# Altium PCB BauhallenUhr_Variante_3.PcbDoc (part 1 of 2)
Units mm, origin at the board's own origin, x right, y up, seen from the top; angles counter-clockwise.
Board outline 93.98 x 68.58 mm, 4 copper layers (Top Layer, Signal Layer 2, GND Layer 3, Bottom Layer), stack 1.54 mm thick; 120 components, 80 nets, 567 pads, 100 vias.
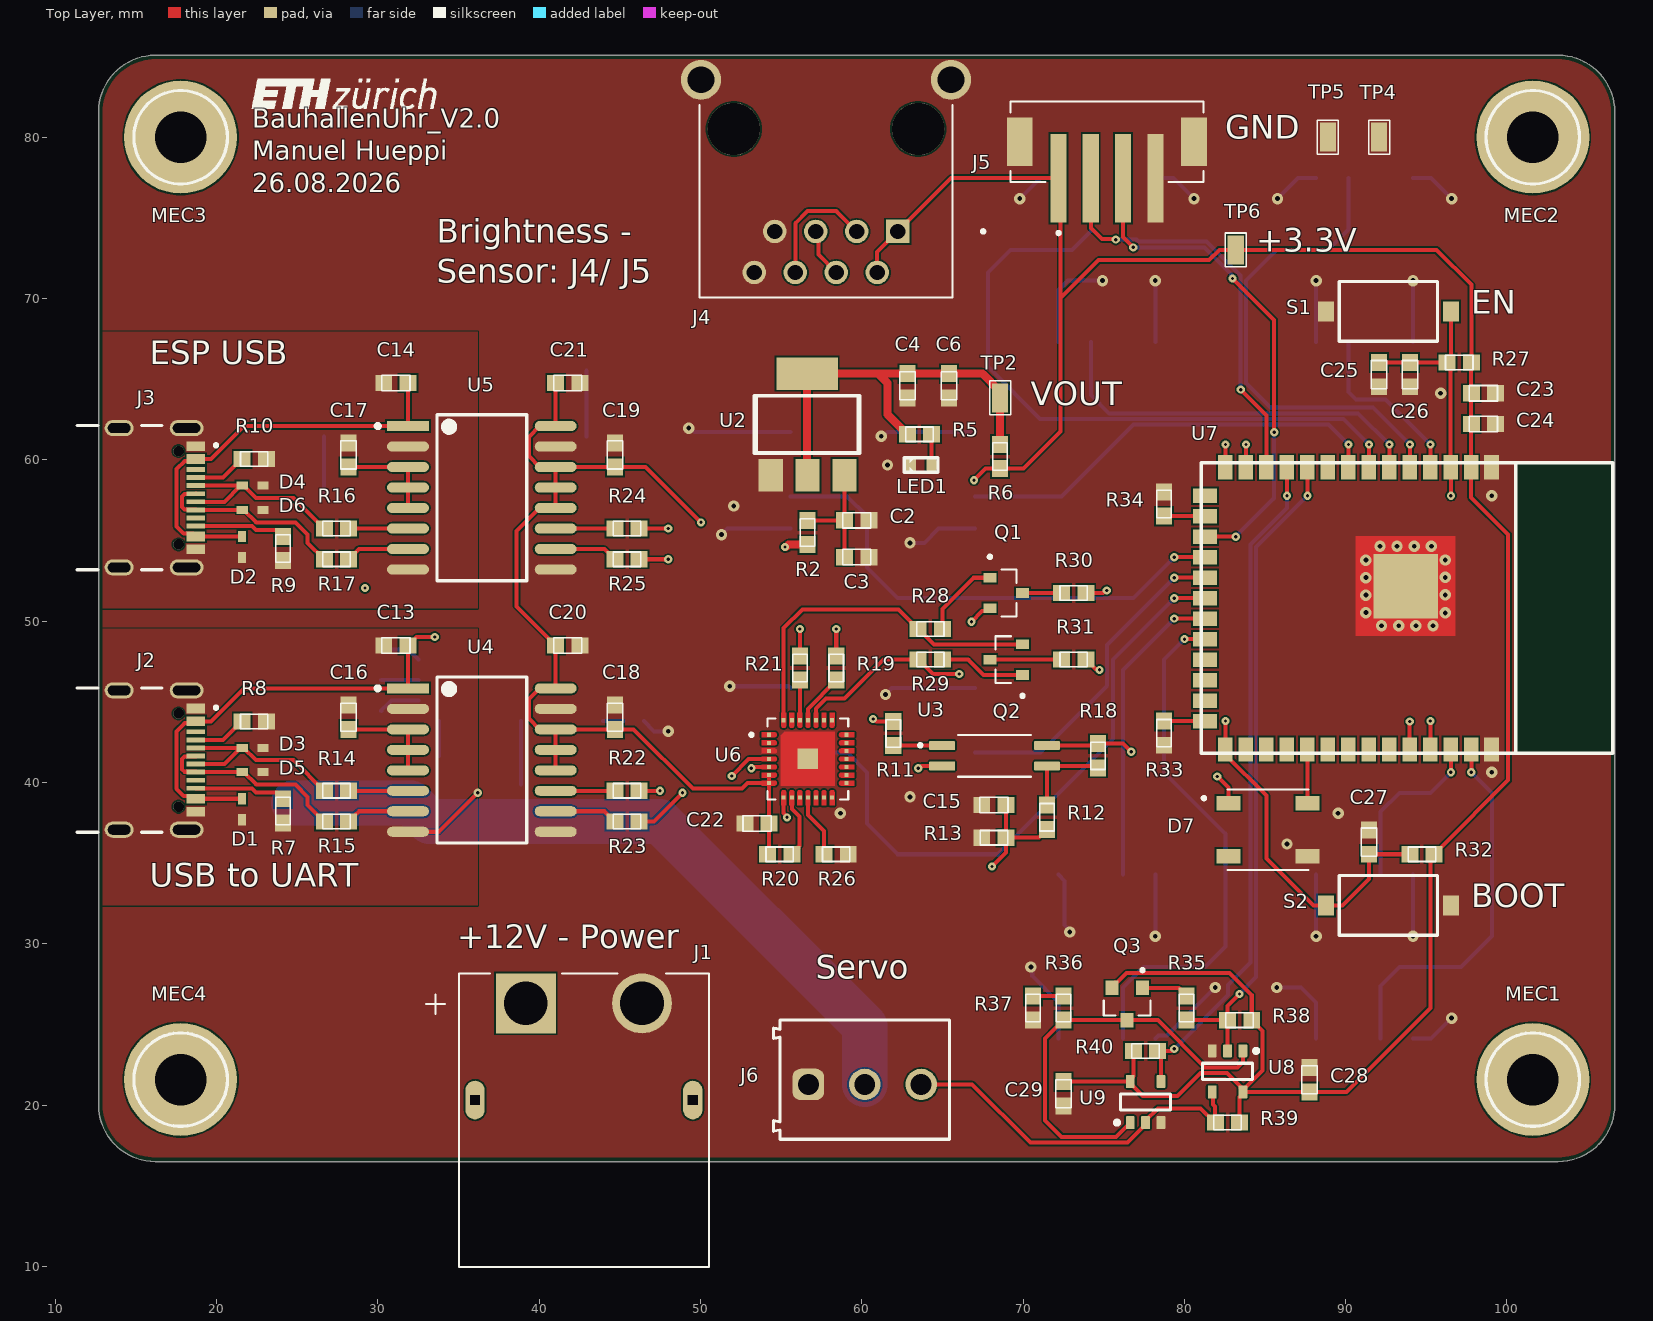
[diagram p0: Top Layer view]
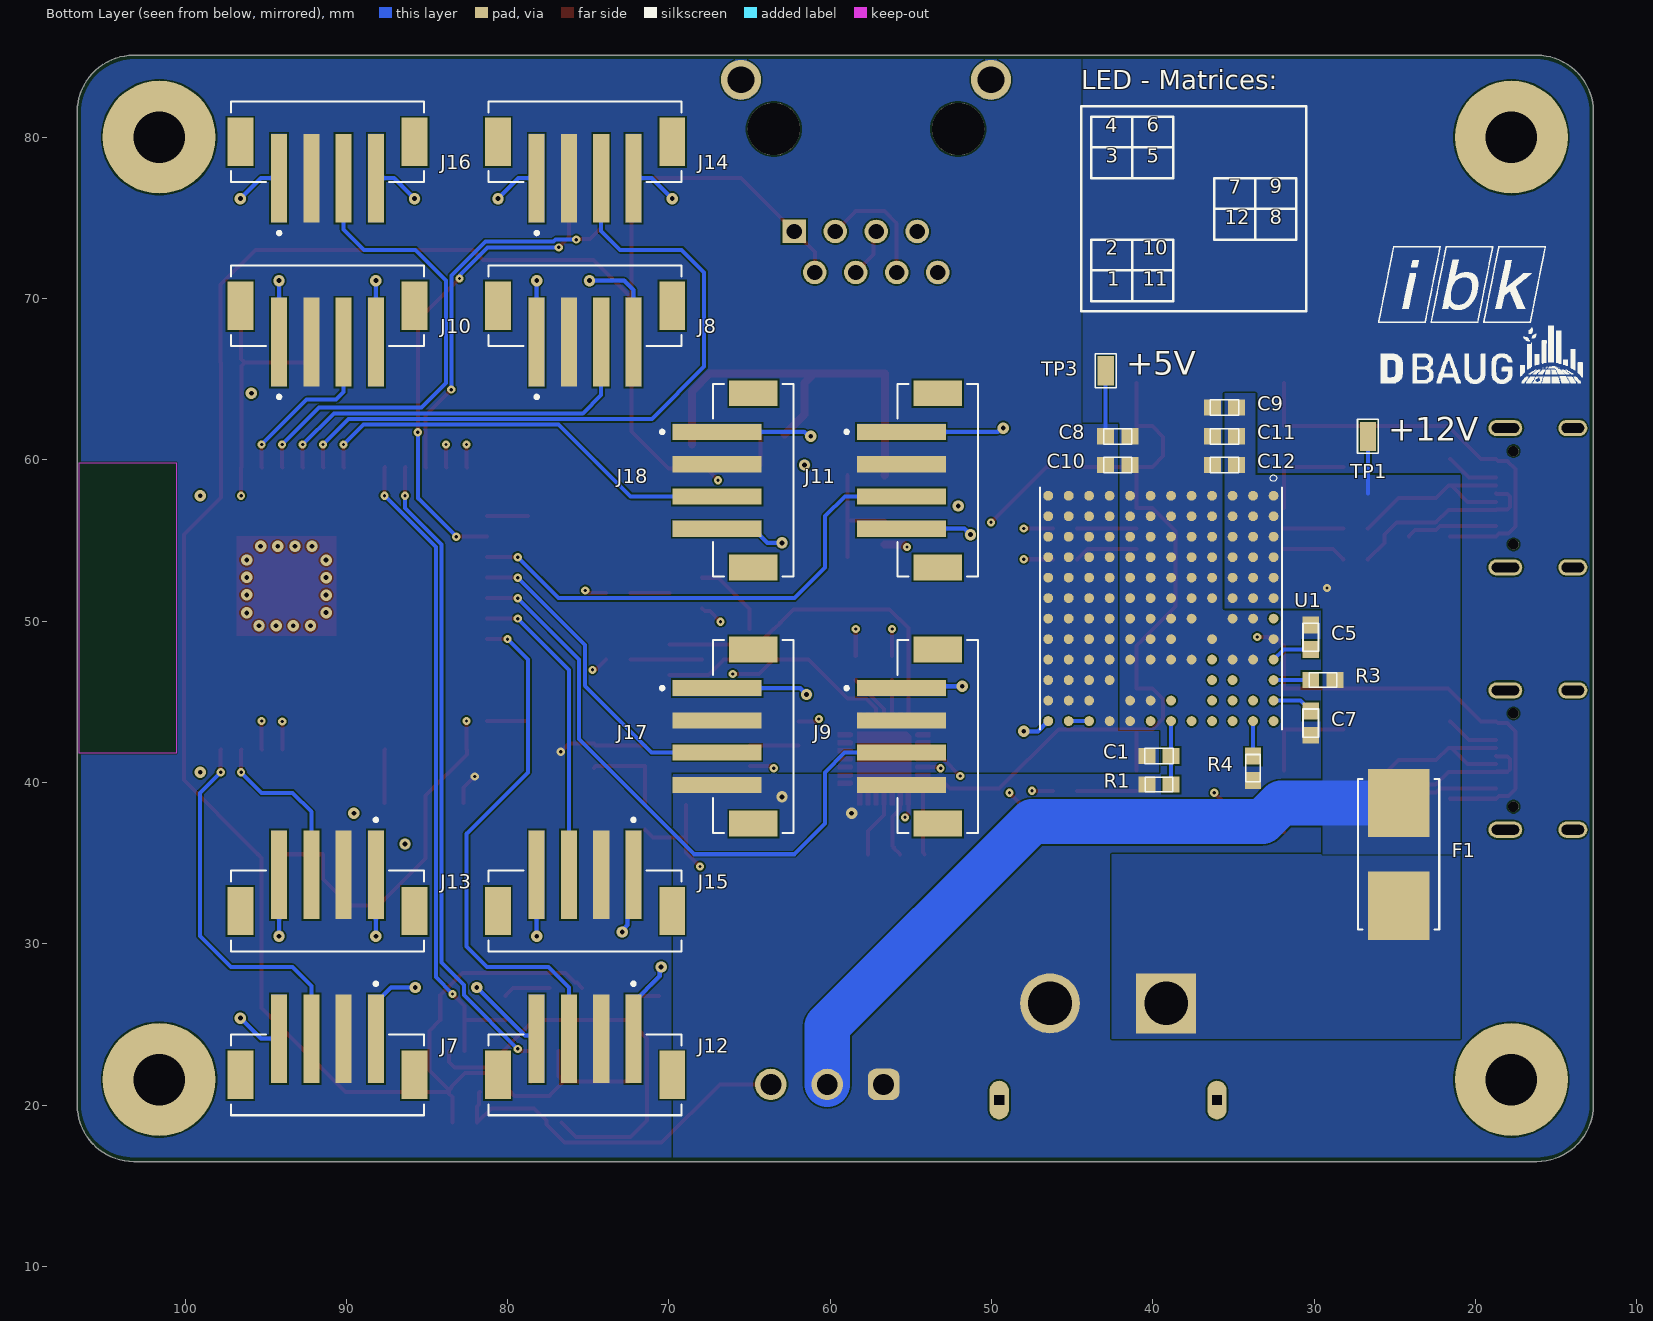
[diagram p1: Bottom Layer view, seen from below]
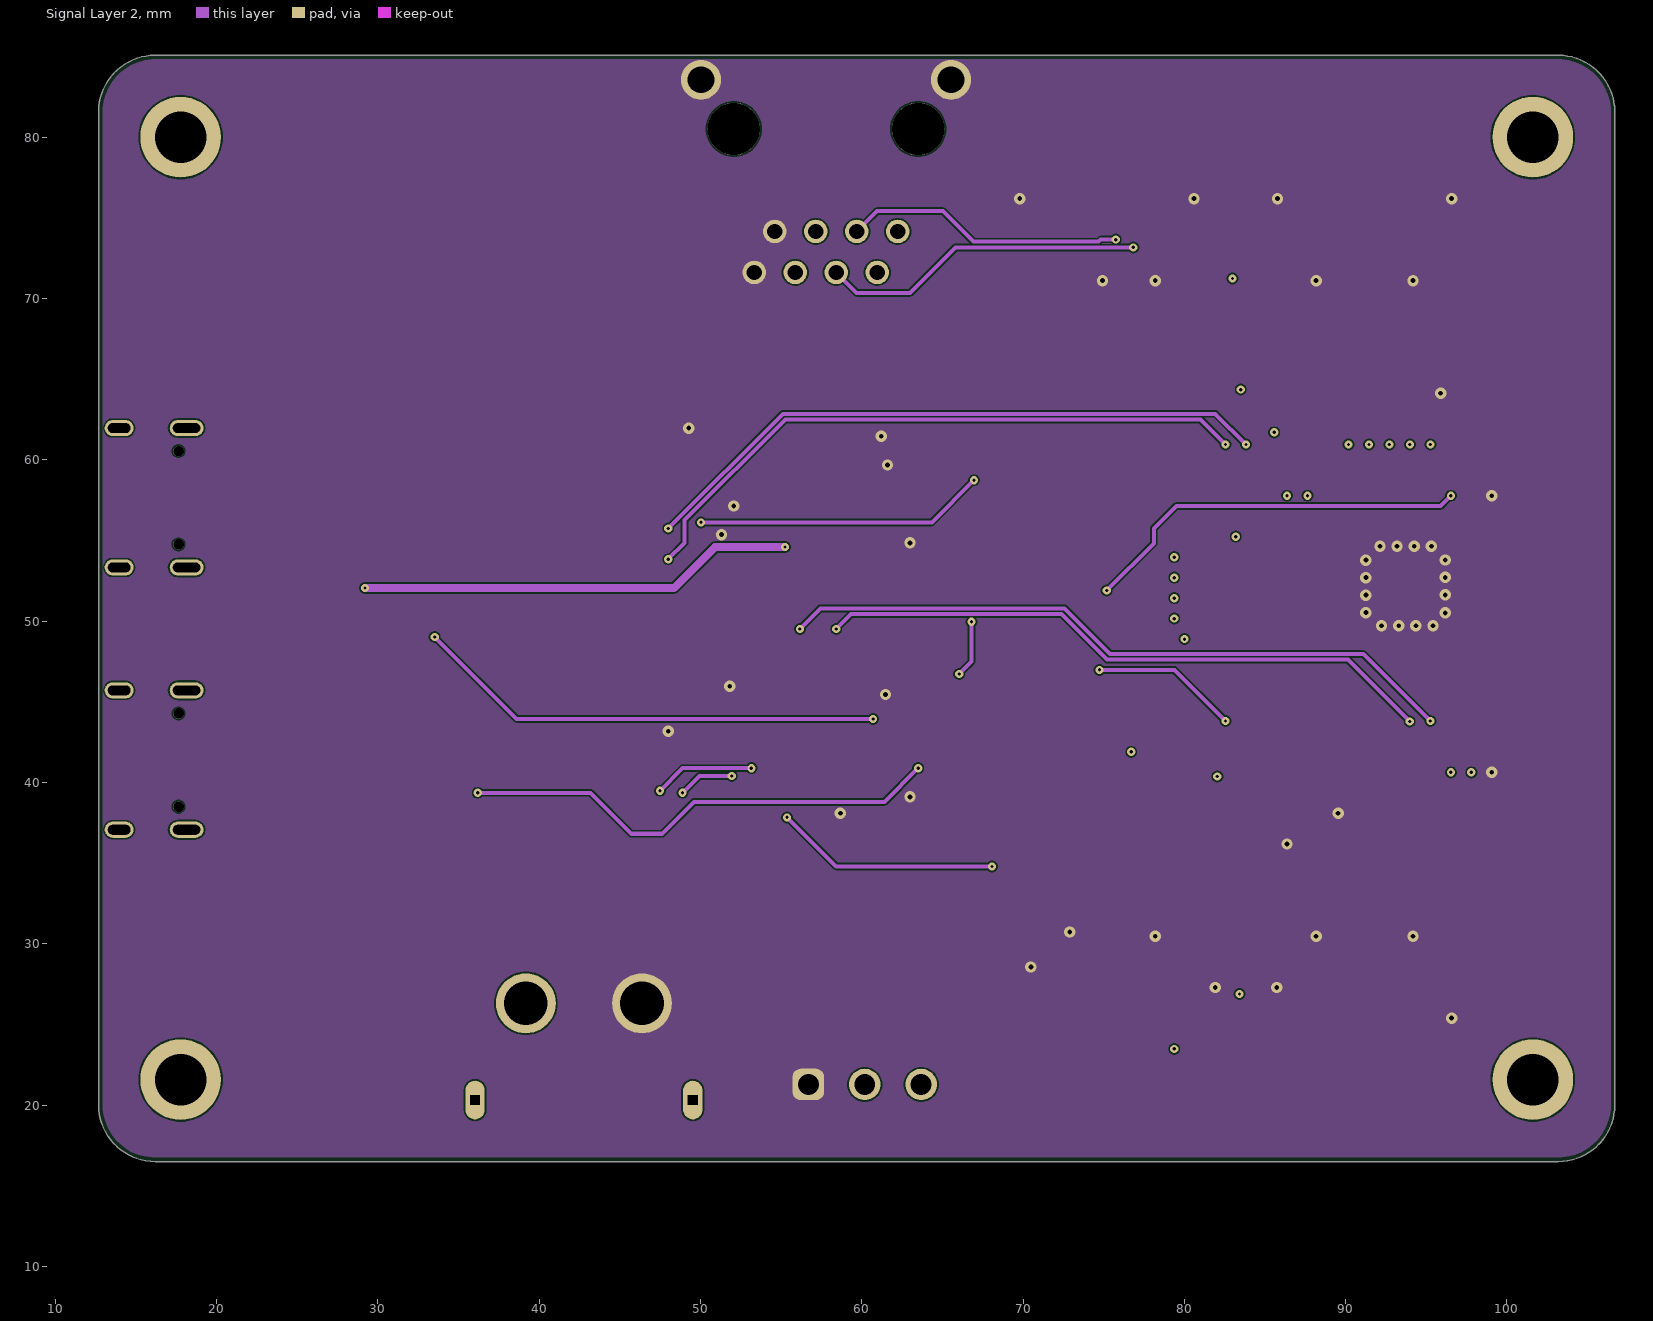
[diagram p2: Signal Layer 2]
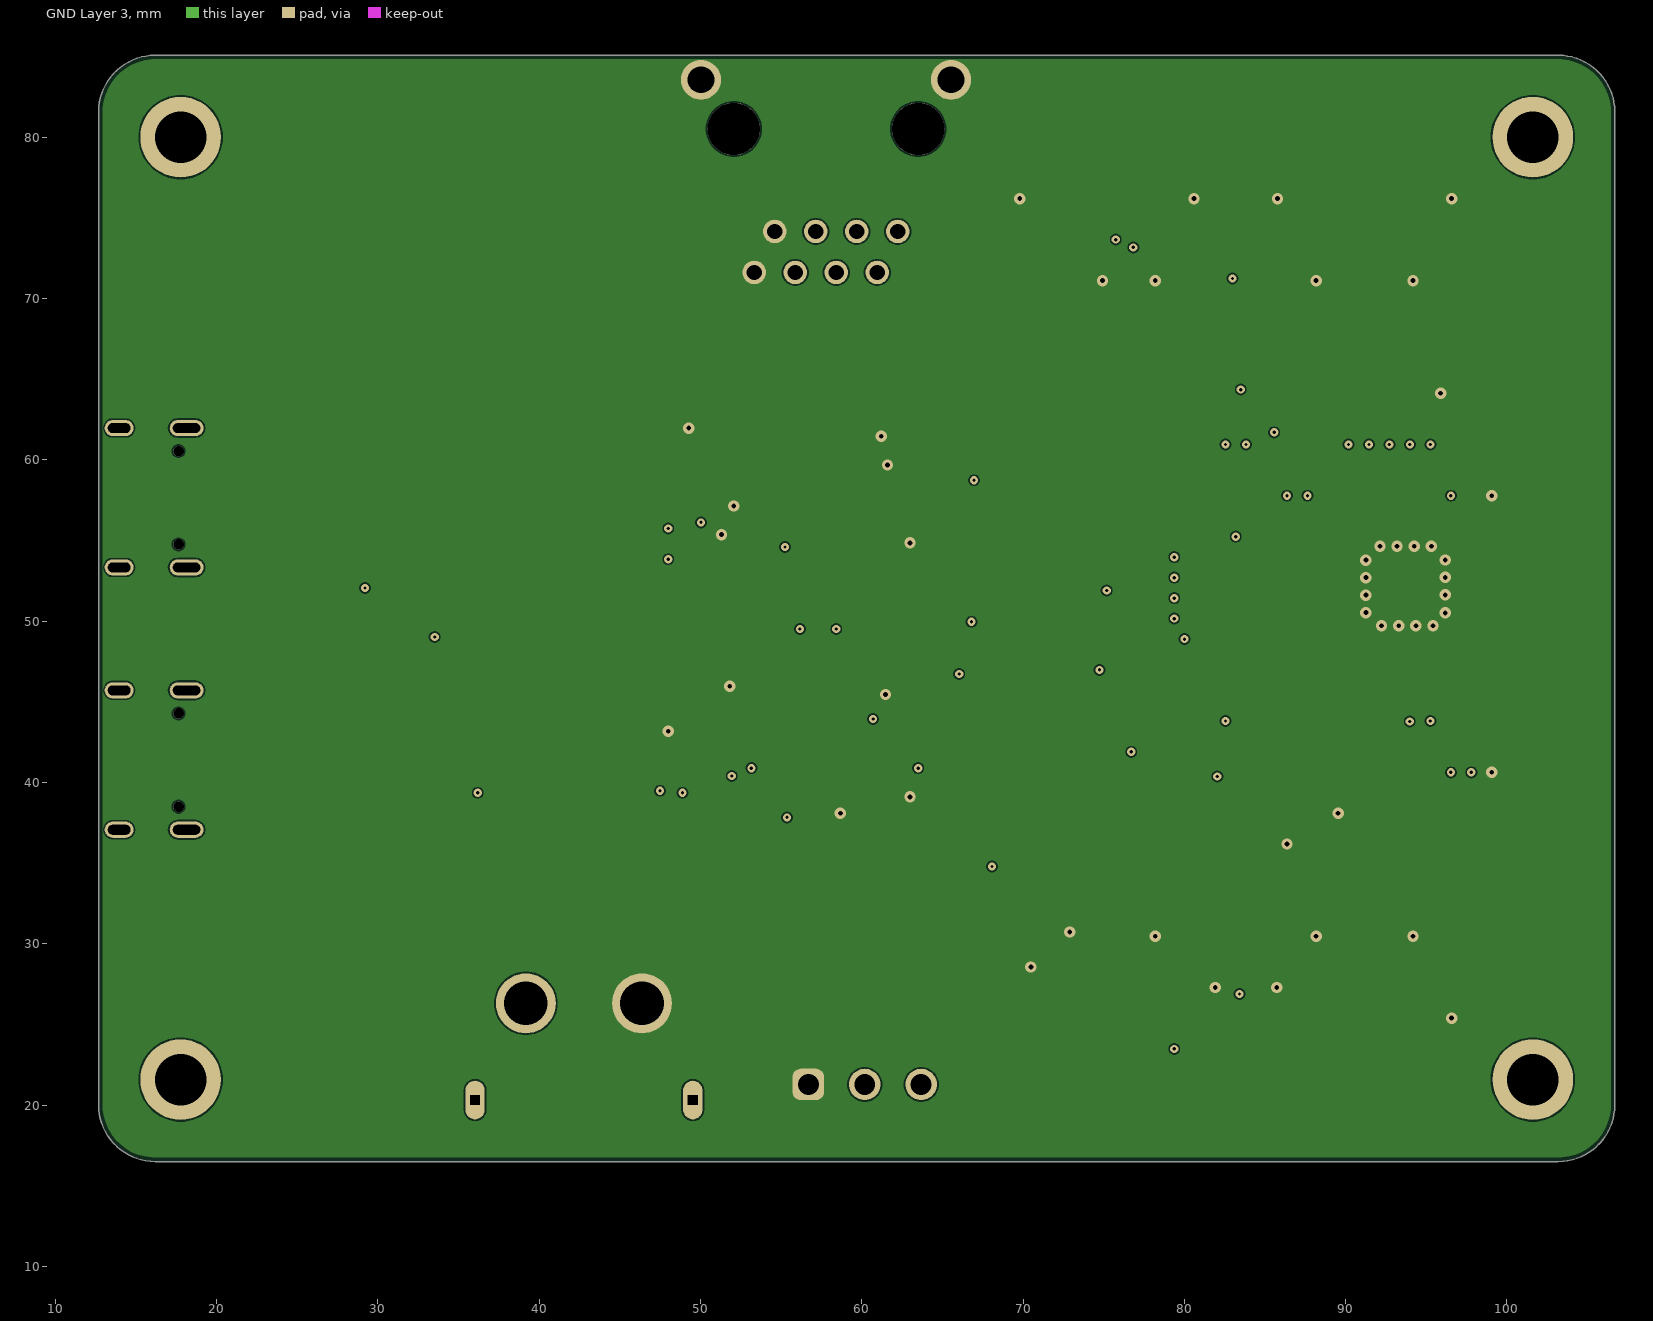
[diagram p3: GND Layer 3]
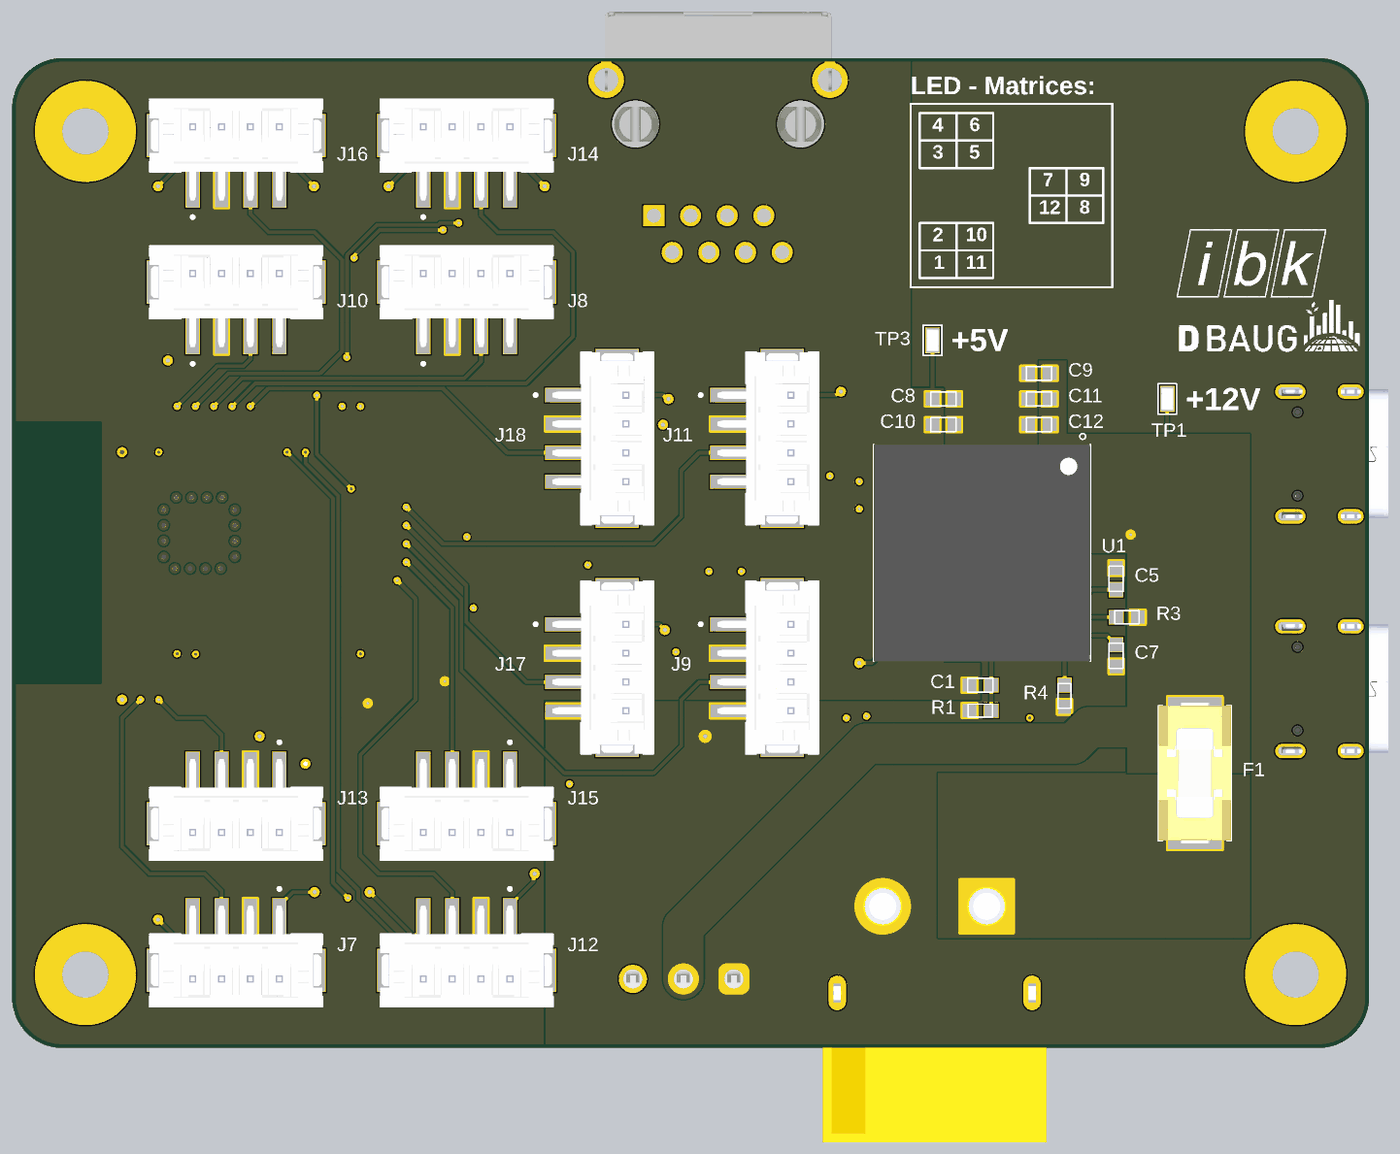
[diagram p5: 3D render of the assembled board from below, using the file's embedded part models]

## Layer stack, top to bottom
Top Solder: solder mask 0.03, Solder Resist, Dk 3.5
Top Layer: signal copper 0.035
Dielectric 1: prepreg 0.3, FR-4 TG 135, Dk 4.2
Signal Layer 2: signal copper 0.035
Dielectric 2: core 0.8, FR-4, Dk 4.2
GND Layer 3: signal copper 0.035
Dielectric 3: prepreg 0.3, RF4 TG 135, Dk 4.2
Bottom Layer: signal copper 0.035
Bottom Solder: solder mask 0.03, Solder Resist, Dk 3.5

## Board outline
12.7,20.01 12.7,81.59 cw(c16.2,81.59) 16.2,85.09 103.18,85.09 cw(c103.18,81.59) 106.68,81.59 106.68,20.01 cw(c103.18,20.01) 103.18,16.51 16.2,16.51 cw(c16.2,20.01)

## Design rules (kind name [scope] priority, off if disabled: settings)
BoardOutlineClearance [All] p1: gap=0.254 ignorepadtopadclearanceinfootprint=FALSE except(0: Arc-SplitContinuation Track-SplitContinuation SMDPad-SplitContinuation THPad-SplitContinuation Via-SplitContinuation Fill-SplitContinuation Poly-SplitContinuation Region-SplitContinuation Text-SplitContinuation)
Clearance Clearance_1 [All] p1: gap=0.1 ignorepadtopadclearanceinfootprint=TRUE
Clearance Clearance_Mini-IC [InNetClass('Mini-IC-Connections')] p2: gap=0.15 ignorepadtopadclearanceinfootprint=TRUE
Clearance Clearance_Text_BOT [InComponent('XXXX_CON101') vs (OnBottomLayer AND IsText)] p3 off: gap=0.01 ignorepadtopadclearanceinfootprint=FALSE except(0: Arc-Hole Track-Hole SMDPad-Hole THPad-Hole Via-Hole Fill-Hole Poly-Hole Region-Hole Text-Hole)
Clearance Clearance_Antennas [(   InComponent('HYB301') OR InComponent('HYB302') OR InComponent('HYB303')  OR InComponent('MEC504') ) vs (   InComponent('HYB301') OR InComponent('HYB302') OR InComponent('HYB303')  OR InComponent('MEC504') )] p4 off: gap=-3 ignorepadtopadclearanceinfootprint=FALSE
Clearance Clearance_GND-Planes [(InNet('GND') OR InNet('SGND')) and InPolygon] p5 off: gap=0.2 ignorepadtopadclearanceinfootprint=TRUE
Clearance [All] p6: gap=0.3 ignorepadtopadclearanceinfootprint=TRUE
ComponentClearance ComponentClearance_HYB_TOP [(   InComponent('HYB301') OR InComponent('HYB302') OR InComponent('HYB303') ) vs (   InComponent('HYB301') OR InComponent('HYB302') OR InComponent('HYB303')   )] p1: gap=-0.1 collisioncheckmode=3 verticalgap=2540 showdistances=FALSE
ComponentClearance ComponentClearance_FREEDOM_TOP [(   InComponent('HYB300'))] p2: gap=-0.1 collisioncheckmode=3 verticalgap=2540 showdistances=FALSE
ComponentClearance ComponentClearance_TP [(HasFootprint('TESTPAD_RND_28') OR HasFootprint('TESTPAD_RND_40'))] p3: gap=-20 collisioncheckmode=3 verticalgap=2 showdistances=FALSE
ComponentClearance ComponentClearance_MEC1&2 [(InComponent('xxx_MEC1') OR InComponent('xxx_MEC2'))] p4: gap=-2 collisioncheckmode=3 verticalgap=-20 showdistances=FALSE
ComponentClearance [All] p5: gap=0.2 collisioncheckmode=3 verticalgap=0.3 showdistances=FALSE
HoleSize [All] p1: absolutevalues=TRUE maxlimit=22 minlimit=0.3 maxpercent=80.000 minpercent=20.000
HoleToHoleClearance [All] p1: gap=0.25 allowstackedmicrovias=TRUE
MinimumAnnularRing [All] p1: minimumring=0.2
MinimumSolderMaskSliver MinimumSolderMaskSliver_CloseComp [InComponent('X100') OR  InComponent('LED203') OR InComponent('LED301') OR InComponent('U206') OR InComponent('U200') OR InComponent('S200') OR InComponent('R301') OR InComponent('LED300') OR InComponent('U302') OR InComponent('U301') OR InComponent('R302') OR InComponent('R303') vs InComponent('X100') OR  InComponent('LED203') OR InComponent('LED301') OR InComponent('U206') OR InComponent('U200') OR InComponent('S200') OR InComponent('R301') OR InComponent('LED300') OR InComponent('U302') OR InComponent('U301') OR InComponent('R302') OR InComponent('R303')] p1 off: minsoldermaskwidth=0.01
MinimumSolderMaskSliver MinimumSolderMaskSliver_CloseComp_1 [InComponent('C210') OR InComponent('C213') OR InComponent('C214') OR InComponent('Y200') OR InComponent('U206') OR InComponent('TP200') OR InComponent('TP201') OR InComponent('Y201') OR InComponent('U300') vs InComponent('C210') OR InComponent('C213') OR InComponent('C214') OR InComponent('Y200') OR InComponent('U206') OR InComponent('TP200') OR InComponent('TP201') OR InComponent('Y201') OR InComponent('U300')] p2 off: minsoldermaskwidth=0.01
MinimumSolderMaskSliver MinimumSolderMaskSliver_CloseComp_2 [InComponent('C204') OR InComponent('C207') OR InComponent('C209') OR InComponent('C212') OR InComponent('R203') OR InComponent('R204') OR InComponent('U203') OR InComponent('U204') OR InComponent('U205') OR InComponent('IC200') OR InComponent('Y201') OR InComponent('Y200') OR InComponent('TP201') vs InComponent('C204') OR InComponent('C207') OR InComponent('C209') OR InComponent('C212') OR InComponent('R203') OR InComponent('R204') OR InComponent('U203') OR InComponent('U204') OR InComponent('U205') OR InComponent('IC200') OR InComponent('Y201') OR InComponent('Y200') OR InComponent('TP201')] p3 off: minsoldermaskwidth=0.01
MinimumSolderMaskSliver MinimumSolderMaskSliver_TextComp [InComponent('CON200') OR InComponent('X100') OR InComponent('S200') OR InComponent('U301') OR IsText vs InComponent('CON200') OR InComponent('X100') OR InComponent('S200') OR InComponent('U301') OR IsText] p4 off: minsoldermaskwidth=0.01
MinimumSolderMaskSliver [All] p5: minsoldermaskwidth=0.1
PasteMaskExpansion [All] p1: expansion=-0.05
PolygonConnect PolygonConnect_Direct [All] p1: connectstyle=Direct reliefconductorwidth=0.254 reliefentries=4 polygonreliefangle="90 Angle" airgapwidth=0.254
PolygonConnect PolygonConnect_Connector [(InComponent('X100') or InComponent('X111') or InComponent('X112') or InComponent('X101') or InComponent('X106')or InComponent('X107') or InComponent('X104') or InComponent('X105')) AND InNet('GND')] p2 off: connectstyle=Direct reliefconductorwidth=0.254 reliefentries=4 polygonreliefangle="90 Angle" airgapwidth=0.254
PolygonConnect PolygonConnect_Via [IsVia] p3 off: connectstyle=Direct reliefconductorwidth=0.254 reliefentries=4 polygonreliefangle="90 Angle" airgapwidth=0.254
PolygonConnect [All] p4 off: connectstyle=Relief reliefconductorwidth=0.254 reliefentries=4 polygonreliefangle="90 Angle" airgapwidth=0.254
RoomDefinition Blackbox_BauhallenUhr_Schematic [InComponentClass('Blackbox_BauhallenUhr_Schematic')] p1: confinementstyle=ConfineIn formatcopy=TRUE lockcomponents=FALSE outline 119.38,85.09 152.4,85.09 152.4,95.25 119.38,95.25
RoutingVias [All] p1: holewidth=0.4 width=0.9 viastyle="Through Hole" minholewidth=0.2 minwidth=0.5 maxholewidth=0.8 maxwidth=1.2
SilkToSilkClearance [All] p1 off: silktosilkclearance=0.254
SilkToSolderMaskClearance SilkscreenOverComponentPads [IsPad] p1 off: minsilkscreentomaskgap=0.254 clearancetoexposedcopper=TRUE
SolderMaskExpansion [All] p1: expansion=0.102 istentingtop=FALSE
SupplyNets "Schematic Supply Nets_6" [InNet('+12V')] p1: voltage=0.000
SupplyNets "Schematic Supply Nets_3" [InNet('VBUS_A')] p2: voltage=0.000
SupplyNets "Schematic Supply Nets_1" [InNet('GND_A')] p3: voltage=0.000
SupplyNets "Schematic Supply Nets_9" [InNet('+5V')] p4: voltage=0.000
SupplyNets "Schematic Supply Nets_5" [InNet('+3.3V')] p5: voltage=0.000
SupplyNets "Schematic Supply Nets_4" [InNet('GND_B')] p6: voltage=0.000
SupplyNets "Schematic Supply Nets_2" [InNet('GND')] p7: voltage=0.000
SupplyNets "Schematic Supply Nets" [InNet('VBUS_B')] p8: voltage=0.000
Width [All] p1: maxlimit=10 minlimit=0.15 preferedwidth=0.3 minimp=50.000000 maximp=50.000000 favimp=50.000000
23 further rules are at their usual default settings.

## Classes and differential pairs
component class U_Power_Supply_Schematic: C1 C2 C3 C4 C5 C6 C7 C8 C9 C10 C11 C12 F1 J1 LED1 R1 R2 R3 R4 R5 R6 TP1 TP2 TP3 TP6 U1 U2
net class D[1..12]: D1 D2 D3 D4 D5 D6 D7 D8 D9 D10 D11 D12
component class U_St3025_Servo_Schematic: C28 C29 J6 Q3 R35 R36 R37 R38 R39 R40 U8 U9
component class U_LED_16x_Schematic: J7 J8 J9 J10 J11 J12 J13 J14 J15 J16 J17 J18
component class U_ESP32_S3_Wroom2_Schematic: ap C13 C14 C15 C16 C17 C18 C19 C20 C21 C22 C23 C24 C25 C26 C27 D1 D2 D3 D4 D5 D6 D7 J2 J3 J4 J5 Q1 Q2 R7 R8 R9 R10 R11 R12 R13 R14 R15 R16 R17 R18 R19 R20 R21 R22 R23 R24 R25 R26 R27 R28 R29 R30 R31 R32 R33 R34 S1 S2 TP4 TP5 U3 U4 U5 U6 U7
component class Blackbox_BauhallenUhr_Schematic: MEC1 MEC2 MEC3 MEC4

## Components (designator, comment, footprint, x,y, rotation, side; value= is the part's Value field where it differs from the comment)
C1 "82p" 0603_CAPACITOR 39.62,41.644 r0 bottom
C2 "10u" 0603_CAPACITOR 59.69,56.261 r180 top
C3 "100n" 0603_CAPACITOR 59.69,53.975 r180 top
C4 "10u" 0603_CAPACITOR 62.83,64.604 r90 top
C5 "100n" 0603_CAPACITOR 30.214,49.01 r270 bottom
C6 "100n" 0603_CAPACITOR 65.405,64.604 r90 top
C7 "150p" 0603_CAPACITOR 30.214,43.688 r90 bottom
C8 "470u" 0603_CAPACITOR 42.176,61.468 r0 bottom
C9 "22u" 0603_CAPACITOR 35.56,63.246 r180 bottom
C10 "100u" 0603_CAPACITOR 42.176,59.69 r0 bottom
C11 "22u" 0603_CAPACITOR 35.56,61.468 r180 bottom
C12 "22u" 0603_CAPACITOR 35.56,59.69 r180 bottom
C13 "100n" 0603_CAPACITOR 31.121,48.51 r0 top
C14 "100n" 0603_CAPACITOR 31.121,64.77 r0 top
C15 "1u" 0603_CAPACITOR 68.192,38.604 r180 top
C16 "10n" 0603_CAPACITOR 28.194,44.055 r90 top
C17 "10n" 0603_CAPACITOR 28.194,60.315 r90 top
C18 "10n" 0603_CAPACITOR 44.704,44.055 r90 top
C19 "10n" 0603_CAPACITOR 44.704,60.315 r90 top
C20 "100n" 0603_CAPACITOR 41.777,48.51 r180 top
C21 "100n" 0603_CAPACITOR 41.777,64.77 r180 top
C22 "10u" 0603_CAPACITOR 53.515,37.46 r0 top
C23 "10u" 0603_CAPACITOR 98.54,64.135 r180 top
C24 "100n" 0603_CAPACITOR 98.54,62.23 r180 top
C25 "1u" 0603_CAPACITOR 92.075,65.29 r90 top
C26 "N.P" 0603_CAPACITOR 93.98,65.29 r90 top
C27 "1u" 0603_CAPACITOR 91.44,36.31 r270 top
C28 "100n" 0603_CAPACITOR 87.757,21.578 r270 top
C29 "100n" 0603_CAPACITOR 72.517,20.713 r90 top
D1 "ESD5B5.0ST1G" ESD_Protecction_Diode 21.59,38.4 r270 top
D2 "ESD5B5.0ST1G" ESD_Protecction_Diode 21.59,54.66 r270 top
D3 "ESD5B5.0ST1G" ESD_Protecction_Diode 22.19,42.15 r0 top
D4 "ESD5B5.0ST1G" ESD_Protecction_Diode 22.19,58.41 r0 top
D5 "ESD5B5.0ST1G" ESD_Protecction_Diode 22.19,40.65 r0 top
D6 "ESD5B5.0ST1G" ESD_Protecction_Diode 22.19,56.91 r0 top
D7 "WS2812B" WS2812B 85.18,37.085 r0 top
F1 "0154010.DR" Fuse 24.765,35.547 r90 bottom
J1 "XT60PW-M" PCB_Connector 42.78,20.32 r0 top
J2 "USB4105-GF-A" USB4105-GF-A 13.97,41.4 r270 top
J3 "USB4105-GF-A" USB4105-GF-A 13.97,57.66 r270 top
J4 "RJE091884511C" RJ45 57.785,80.518 r180 top
J5 "B4B-PH-SM4-TB" Connector_SMD 75.2,79.72 r0 top
J6 "691214110003" Screw_Connector 60.187,21.59 r0 top
J7 "B4B-PH-SM4-TB" Connector_SMD 91.17,21.88 r0 bottom
J8 "B4B-PH-SM4-TB" Connector_SMD 75.2,69.56 r180 bottom
J9 "B4B-PH-SM4-TB" Connector_SMD 53.34,42.86 r270 bottom
J10 "B4B-PH-SM4-TB" Connector_SMD 91.17,69.56 r180 bottom
J11 "B4B-PH-SM4-TB" Connector_SMD 53.34,58.74 r270 bottom
J12 "B4B-PH-SM4-TB" Connector_SMD 75.2,21.88 r0 bottom
J13 "B4B-PH-SM4-TB" Connector_SMD 91.17,32.04 r0 bottom
J14 "B4B-PH-SM4-TB" Connector_SMD 75.2,79.72 r180 bottom
J15 "B4B-PH-SM4-TB" Connector_SMD 75.2,32.04 r0 bottom
J16 "B4B-PH-SM4-TB" Connector_SMD 91.17,79.72 r180 bottom
J17 "B4B-PH-SM4-TB" Connector_SMD 64.77,42.86 r270 bottom
J18 "B4B-PH-SM4-TB" Connector_SMD 64.77,58.74 r270 bottom
LED1 "GREEN" "LED_0603, GREEN" 63.68,59.69 r180 top
MEC1 "Mounting Hole M3, plated" "Mounting Hole M3, plated" 101.6,21.59 r0 top
MEC2 "Mounting Hole M3, plated" "Mounting Hole M3, plated" 101.6,80.01 r0 top
MEC3 "Mounting Hole M3, plated" "Mounting Hole M3, plated" 17.78,80.01 r0 top
MEC4 "Mounting Hole M3, plated" "Mounting Hole M3, plated" 17.78,21.59 r0 top
Q1 "SS8050" NPN_Bipolar_Transistor 68.955,51.75 r0 top
Q2 "SS8050" NPN_Bipolar_Transistor 68.955,47.625 r180 top
Q3 "S8550" PNP_Bipolar_Transistor 76.454,26.273 r270 top
R1 "8.25k" 0603_Resistor 39.62,39.878 r180 bottom
R2 "0" 0603_Resistor 56.642,55.499 r90 top
R3 "10k" 0603_Resistor 29.464,46.355 r180 bottom
R4 "100k" 0603_Resistor 33.79,40.894 r90 bottom
R5 "3.3k" 0603_Resistor 63.58,61.595 r180 top
R6 "0" 0603_Resistor 68.58,60.21 r270 top
R7 "5.1k" 0603_Resistor 24.13,38.25 r270 top
R8 "5.1k" 0603_Resistor 22.34,43.8 r0 top
R9 "5.1k" 0603_Resistor 24.13,54.51 r270 top
R10 "5.1k" 0603_Resistor 22.34,60.06 r0 top
R11 "360" 0603_Resistor 61.957,43.049 r90 top
R12 "22.1k" 0603_Resistor 71.482,37.854 r90 top
R13 "47.5k" 0603_Resistor 68.192,36.584 r0 top
R14 "24" 0603_Resistor 27.444,39.495 r0 top
R15 "24" 0603_Resistor 27.444,37.588 r0 top
R16 "24" 0603_Resistor 27.444,55.755 r0 top
R17 "24" 0603_Resistor 27.444,53.848 r0 top
R18 "N.P" 0603_Resistor 74.657,41.664 r90 top
R19 "0" 0603_Resistor 58.42,47.105 r270 top
R20 "1k" 0603_Resistor 54.915,35.56 r180 top
R21 "0" 0603_Resistor 56.165,47.105 r270 top
R22 "24" 0603_Resistor 45.454,39.495 r0 top
R23 "24" 0603_Resistor 45.454,37.588 r0 top
R24 "24" 0603_Resistor 45.454,55.755 r0 top
R25 "24" 0603_Resistor 45.454,53.848 r0 top
R26 "N.P" 0603_Resistor 58.415,35.56 r180 top
R27 "10k" 0603_Resistor 97.04,66.04 r0 top
R28 "10k" 0603_Resistor 64.25,49.53 r180 top
R29 "10k" 0603_Resistor 64.25,47.625 r180 top
R30 "0" 0603_Resistor 73.14,51.75 r0 top
R31 "0" 0603_Resistor 73.14,47.625 r0 top
R32 "10k" 0603_Resistor 94.73,35.56 r0 top
R33 "10k" 0603_Resistor 78.74,43.065 r270 top
R34 "10k" 0603_Resistor 78.74,57.265 r90 top
R35 "10k" 0603_Resistor 80.137,26.023 r270 top
R36 "10k" 0603_Resistor 72.517,26.023 r270 top
R37 "10k" 0603_Resistor 70.612,26.023 r90 top
R38 "10k" 0603_Resistor 83.427,25.273 r0 top
R39 "10k" 0603_Resistor 82.677,18.923 r0 top
R40 "10k" 0603_Resistor 77.597,23.368 r180 top
S1 "?" PTS636SK25SMTR 92.645,69.215 r0 top
S2 "?" PTS636SK25SMTR 92.645,32.385 r180 top
TP1 "Testpoint S2761-46R" "Testpoint S2761-46R" 26.67,61.468 r90 bottom
TP2 "Testpoint S2761-46R" "Testpoint S2761-46R" 68.58,63.854 r90 top
TP3 "Testpoint S2761-46R" "Testpoint S2761-46R" 42.926,65.532 r90 bottom
TP4 "Testpoint S2761-46R" "Testpoint S2761-46R" 92.075,80.01 r90 top
TP5 "Testpoint S2761-46R" "Testpoint S2761-46R" 88.9,80.01 r90 top
TP6 "Testpoint S2761-46R" "Testpoint S2761-46R" 83.185,73.025 r90 top
U1 "LTM4627EY#PBF" DCDC_Converter 39.505,50.8 r270 bottom
U2 "LD1117S33CTR" LD1117S33CTR 56.617,62.205 r0 top
U3 "TLP291(GB-TP,SE)" Optocoupler 68.232,41.664 r0 top
U4 "ADUM3160BRWZ" USB_Digital_Isolator_A 36.449,41.4 r0 top
U5 "ADUM3160BRWZ" USB_Digital_Isolator_A 36.449,57.66 r0 top
U6 "CP2102N-A02-GQFN28R" CP2102N-A02-GQFN28R 56.665,41.467 r0 top
U7 "ESP32-S3-WROOM-2" ESP32-S3-WROOM-2 90.16,50.8 r270 top
U8 "SN74LVC1G126DBVR" DBV0005A_L_Single_Bus_Buffer_Gate 82.677,22.098 r270 top
U9 "SN74LVC1G125DBVR" DBV0005A_L_Single_Bus_Buffer_Gate 77.597,20.198 r90 top

## Footprints (in the part's own frame and the unit in brackets; to place one, negate y for a bottom-side part, rotate by r counter-clockwise, add the part's x,y. Pads: shape width x height; smd on the part's side, far side on the other; paste and mask are expansions set on the pad)
0603_CAPACITOR [mm]
  rect 1.05x1 smd: 1(-0.75,0) 2(0.75,0)
  silkscreen extent -0.88,-0.48 0.87,0.48, body extent -0.88,-0.48 0.87,0.48, height 0.9
0603_Resistor [mm]
  rect 1.05x1 smd: 1(-0.75,0) 2(0.75,0)
  silkscreen extent -0.85,-0.45 0.85,0.45, body extent -0.85,-0.45 0.85,0.45, height 0.55
Connector_SMD [mm] "B4B-PH-SM4-TB, CONN HEADER SMD 4POS 2MM."
  rect 1x5.5 smd: 1(-3,-2.25) 2(-1,-2.25) 3(1,-2.25) 4(3,-2.25)
  rect 1.6x3 smd: SH1(-5.4,0) SH2(5.4,0)
  silkscreen extent -5.97,-5.75 5.97,2.5, body extent -5.97,-4.5 5.97,2.5, height 6.75
CP2102N-A02-GQFN28R [mm] "USB to UART bridge."
  rect 0.25x0.25 smd paste-1 mask+0: 1(-2.4,1.5) 2(-2.4,1) 3(-2.4,0.5) 4(-2.4,0) 5(-2.4,-0.5) 6(-2.4,-1) 7(-2.4,-1.5) 8(-1.5,-2.4) 9(-1,-2.4) 10(-0.5,-2.4) 11(0,-2.4) 12(0.5,-2.4) 13(1,-2.4) 14(1.5,-2.4) 15(2.4,-1.5) 16(2.4,-1) 17(2.4,-0.5) 18(2.4,0) 19(2.4,0.5) 20(2.4,1) 21(2.4,1.5) 22(1.5,2.4) 23(1,2.4) 24(0.5,2.4) 25(0,2.4) 26(-0.5,2.4) 27(-1,2.4) 28(-1.5,2.4)
  rect 1.27x1.27 smd paste+0.424 mask+0: 29(0,0)
  Top Layer region: 1.675,-1.675 -1.675,-1.675 -1.675,1.425 -1.425,1.675 1.675,1.675
  Top Layer region: -2.059,0.649 -2.052,0.648 -2.044,0.647 -2.036,0.645 -2.029,0.643 -2.021,0.64 -2.014,0.637 -2.007,0.634 -2,0.63 -1.993,0.626 -1.987,0.621 -1.981,0.617 -1.975,0.611 -1.969,0.606 -1.964,0.6 -1.958,0.594 -1.954,0.588 -1.949,0.582 -1.945,0.575 -1.941,0.568 -1.938,0.561 -1.935,0.554 -1.932,0.546 -1.93,0.539 -1.928,0.531 -1.927,0.523 -1.926,0.516 -1.925,0.508 -1.925,0.5 -1.925,0.492 -1.926,0.484 -1.927,0.477 -1.928,0.469 -1.93,0.461 -1.932,0.454 -1.935,0.446 -1.938,0.439 -1.941,0.432 -1.945,0.425 -1.949,0.418 -1.954,0.412 -1.958,0.406 -1.964,0.4 -1.969,0.394 -1.975,0.389 -1.981,0.383 -1.987,0.379 -1.993,0.374 -2,0.37 -2.007,0.366 -2.014,0.363 -2.021,0.36 -2.029,0.357 -2.036,0.355 -2.044,0.353 -2.052,0.352 -2.059,0.351 -2.067,0.35 -2.875,0.35 -2.875,0.65 -2.067,0.65
  Top Layer region: -2.059,-1.351 -2.052,-1.352 -2.044,-1.353 -2.036,-1.355 -2.029,-1.357 -2.021,-1.36 -2.014,-1.363 -2.007,-1.366 -2,-1.37 -1.993,-1.374 -1.987,-1.379 -1.981,-1.383 -1.975,-1.389 -1.969,-1.394 -1.964,-1.4 -1.958,-1.406 -1.954,-1.412 -1.949,-1.418 -1.945,-1.425 -1.941,-1.432 -1.938,-1.439 -1.935,-1.446 -1.932,-1.454 -1.93,-1.461 -1.928,-1.469 -1.927,-1.477 -1.926,-1.484 -1.925,-1.492 -1.925,-1.5 -1.925,-1.508 -1.926,-1.516 -1.927,-1.523 -1.928,-1.531 -1.93,-1.539 -1.932,-1.546 -1.935,-1.554 -1.938,-1.561 -1.941,-1.568 -1.945,-1.575 -1.949,-1.582 -1.954,-1.588 -1.958,-1.594 -1.964,-1.6 -1.969,-1.606 -1.975,-1.611 -1.981,-1.617 -1.987,-1.621 -1.993,-1.626 -2,-1.63 -2.007,-1.634 -2.014,-1.637 -2.021,-1.64 -2.029,-1.643 -2.036,-1.645 -2.044,-1.647 -2.052,-1.648 -2.059,-1.649 -2.067,-1.65 -2.875,-1.65 -2.875,-1.35 -2.067,-1.35
  Top Layer region: -2.059,-0.851 -2.052,-0.852 -2.044,-0.853 -2.036,-0.855 -2.029,-0.857 -2.021,-0.86 -2.014,-0.863 -2.007,-0.866 -2,-0.87 -1.993,-0.874 -1.987,-0.879 -1.981,-0.883 -1.975,-0.889 -1.969,-0.894 -1.964,-0.9 -1.958,-0.906 -1.954,-0.912 -1.949,-0.918 -1.945,-0.925 -1.941,-0.932 -1.938,-0.939 -1.935,-0.946 -1.932,-0.954 -1.93,-0.961 -1.928,-0.969 -1.927,-0.977 -1.926,-0.984 -1.925,-0.992 -1.925,-1 -1.925,-1.008 -1.926,-1.016 -1.927,-1.023 -1.928,-1.031 -1.93,-1.039 -1.932,-1.046 -1.935,-1.054 -1.938,-1.061 -1.941,-1.068 -1.945,-1.075 -1.949,-1.082 -1.954,-1.088 -1.958,-1.094 -1.964,-1.1 -1.969,-1.106 -1.975,-1.111 -1.981,-1.117 -1.987,-1.121 -1.993,-1.126 -2,-1.13 -2.007,-1.134 -2.014,-1.137 -2.021,-1.14 -2.029,-1.143 -2.036,-1.145 -2.044,-1.147 -2.052,-1.148 -2.059,-1.149 -2.067,-1.15 -2.875,-1.15 -2.875,-0.85 -2.067,-0.85
  Top Layer region: 0.65,2.075 0.65,2.067 0.649,2.059 0.648,2.052 0.647,2.044 0.645,2.036 0.643,2.029 0.64,2.021 0.637,2.014 0.634,2.007 0.63,2 0.626,1.993 0.621,1.987 0.617,1.981 0.611,1.975 0.606,1.969 0.6,1.964 0.594,1.958 0.588,1.954 0.582,1.949 0.575,1.945 0.568,1.941 0.561,1.938 0.554,1.935 0.546,1.932 0.539,1.93 0.531,1.928 0.523,1.927 0.516,1.926 0.508,1.925 0.492,1.925 0.484,1.926 0.477,1.927 0.469,1.928 0.461,1.93 0.454,1.932 0.446,1.935 0.439,1.938 0.432,1.941 0.425,1.945 0.418,1.949 0.412,1.954 0.406,1.958 0.4,1.964 0.394,1.969 0.389,1.975 0.383,1.981 0.379,1.987 0.374,1.993 0.37,2 0.366,2.007 0.363,2.014 0.36,2.021 0.357,2.029 0.355,2.036 0.353,2.044 0.352,2.052 0.351,2.059 0.35,2.067 0.35,2.075 0.35,2.875 0.65,2.875
  Top Layer region: -1.35,2.075 -1.35,2.067 -1.351,2.059 -1.352,2.052 -1.353,2.044 -1.355,2.036 -1.357,2.029 -1.36,2.021 -1.363,2.014 -1.366,2.007 -1.37,2 -1.374,1.993 -1.379,1.987 -1.383,1.981 -1.389,1.975 -1.394,1.969 -1.4,1.964 -1.406,1.958 -1.412,1.954 -1.418,1.949 -1.425,1.945 -1.432,1.941 -1.439,1.938 -1.446,1.935 -1.454,1.932 -1.461,1.93 -1.469,1.928 -1.477,1.927 -1.484,1.926 -1.492,1.925 -1.508,1.925 -1.516,1.926 -1.523,1.927 -1.531,1.928 -1.539,1.93 -1.546,1.932 -1.554,1.935 -1.561,1.938 -1.568,1.941 -1.575,1.945 -1.582,1.949 -1.588,1.954 -1.594,1.958 -1.6,1.964 -1.606,1.969 -1.611,1.975 -1.617,1.981 -1.621,1.987 -1.626,1.993 -1.63,2 -1.634,2.007 -1.637,2.014 -1.64,2.021 -1.643,2.029 -1.645,2.036 -1.647,2.044 -1.648,2.052 -1.649,2.059 -1.65,2.067 -1.65,2.075 -1.65,2.875 -1.35,2.875
  Top Layer region: -1.484,-1.926 -1.477,-1.927 -1.469,-1.928 -1.461,-1.93 -1.454,-1.932 -1.446,-1.935 -1.439,-1.938 -1.432,-1.941 -1.425,-1.945 -1.418,-1.949 -1.412,-1.954 -1.406,-1.958 -1.4,-1.964 -1.394,-1.969 -1.389,-1.975 -1.383,-1.981 -1.379,-1.987 -1.374,-1.993 -1.37,-2 -1.366,-2.007 -1.363,-2.014 -1.36,-2.021 -1.357,-2.029 -1.355,-2.036 -1.353,-2.044 -1.352,-2.052 -1.351,-2.059 -1.35,-2.067 -1.35,-2.075 -1.35,-2.875 -1.65,-2.875 -1.65,-2.075 -1.65,-2.067 -1.649,-2.059 -1.648,-2.052 -1.647,-2.044 -1.645,-2.036 -1.643,-2.029 -1.64,-2.021 -1.637,-2.014 -1.634,-2.007 -1.63,-2 -1.626,-1.993 -1.621,-1.987 -1.617,-1.981 -1.611,-1.975 -1.606,-1.969 -1.6,-1.964 -1.594,-1.958 -1.588,-1.954 -1.582,-1.949 -1.575,-1.945 -1.568,-1.941 -1.561,-1.938 -1.554,-1.935 -1.546,-1.932 -1.539,-1.93 -1.531,-1.928 -1.523,-1.927 -1.516,-1.926 -1.508,-1.925 -1.492,-1.925
  Top Layer region: -2.059,1.649 -2.052,1.648 -2.044,1.647 -2.036,1.645 -2.029,1.643 -2.021,1.64 -2.014,1.637 -2.007,1.634 -2,1.63 -1.993,1.626 -1.987,1.621 -1.981,1.617 -1.975,1.611 -1.969,1.606 -1.964,1.6 -1.958,1.594 -1.954,1.588 -1.949,1.582 -1.945,1.575 -1.941,1.568 -1.938,1.561 -1.935,1.554 -1.932,1.546 -1.93,1.539 -1.928,1.531 -1.927,1.523 -1.926,1.516 -1.925,1.508 -1.925,1.5 -1.925,1.492 -1.926,1.484 -1.927,1.477 -1.928,1.469 -1.93,1.461 -1.932,1.454 -1.935,1.446 -1.938,1.439 -1.941,1.432 -1.945,1.425 -1.949,1.418 -1.954,1.412 -1.958,1.406 -1.964,1.4 -1.969,1.394 -1.975,1.389 -1.981,1.383 -1.987,1.379 -1.993,1.374 -2,1.37 -2.007,1.366 -2.014,1.363 -2.021,1.36 -2.029,1.357 -2.036,1.355 -2.044,1.353 -2.052,1.352 -2.059,1.351 -2.067,1.35 -2.875,1.35 -2.875,1.65 -2.067,1.65
  Top Layer region: -2.059,1.149 -2.052,1.148 -2.044,1.147 -2.036,1.145 -2.029,1.143 -2.021,1.14 -2.014,1.137 -2.007,1.134 -2,1.13 -1.993,1.126 -1.987,1.121 -1.981,1.117 -1.975,1.111 -1.969,1.106 -1.964,1.1 -1.958,1.094 -1.954,1.088 -1.949,1.082 -1.945,1.075 -1.941,1.068 -1.938,1.061 -1.935,1.054 -1.932,1.046 -1.93,1.039 -1.928,1.031 -1.927,1.023 -1.926,1.016 -1.925,1.008 -1.925,1 -1.925,0.992 -1.926,0.984 -1.927,0.977 -1.928,0.969 -1.93,0.961 -1.932,0.954 -1.935,0.946 -1.938,0.939 -1.941,0.932 -1.945,0.925 -1.949,0.918 -1.954,0.912 -1.958,0.906 -1.964,0.9 -1.969,0.894 -1.975,0.889 -1.981,0.883 -1.987,0.879 -1.993,0.874 -2,0.87 -2.007,0.866 -2.014,0.863 -2.021,0.86 -2.029,0.857 -2.036,0.855 -2.044,0.853 -2.052,0.852 -2.059,0.851 -2.067,0.85 -2.875,0.85 -2.875,1.15 -2.067,1.15
  Top Layer region: -2.059,0.149 -2.052,0.148 -2.044,0.147 -2.036,0.145 -2.029,0.143 -2.021,0.14 -2.014,0.137 -2.007,0.134 -2,0.13 -1.993,0.126 -1.987,0.121 -1.981,0.117 -1.975,0.111 -1.969,0.106 -1.964,0.1 -1.958,0.094 -1.954,0.088 -1.949,0.082 -1.945,0.075 -1.941,0.068 -1.938,0.061 -1.935,0.054 -1.932,0.046 -1.93,0.039 -1.928,0.031 -1.927,0.023 -1.926,0.016 -1.925,0.008 -1.925,0 -1.925,-0.008 -1.926,-0.016 -1.927,-0.023 -1.928,-0.031 -1.93,-0.039 -1.932,-0.046 -1.935,-0.054 -1.938,-0.061 -1.941,-0.068 -1.945,-0.075 -1.949,-0.082 -1.954,-0.088 -1.958,-0.094 -1.964,-0.1 -1.969,-0.106 -1.975,-0.111 -1.981,-0.117 -1.987,-0.121 -1.993,-0.126 -2,-0.13 -2.007,-0.134 -2.014,-0.137 -2.021,-0.14 -2.029,-0.143 -2.036,-0.145 -2.044,-0.147 -2.052,-0.148 -2.059,-0.149 -2.067,-0.15 -2.875,-0.15 -2.875,0.15 -2.067,0.15
  Top Layer region: -2.059,-0.351 -2.052,-0.352 -2.044,-0.353 -2.036,-0.355 -2.029,-0.357 -2.021,-0.36 -2.014,-0.363 -2.007,-0.366 -2,-0.37 -1.993,-0.374 -1.987,-0.379 -1.981,-0.383 -1.975,-0.389 -1.969,-0.394 -1.964,-0.4 -1.958,-0.406 -1.954,-0.412 -1.949,-0.418 -1.945,-0.425 -1.941,-0.432 -1.938,-0.439 -1.935,-0.446 -1.932,-0.454 -1.93,-0.461 -1.928,-0.469 -1.927,-0.477 -1.926,-0.484 -1.925,-0.492 -1.925,-0.5 -1.925,-0.508 -1.926,-0.516 -1.927,-0.523 -1.928,-0.531 -1.93,-0.539 -1.932,-0.546 -1.935,-0.554 -1.938,-0.561 -1.941,-0.568 -1.945,-0.575 -1.949,-0.582 -1.954,-0.588 -1.958,-0.594 -1.964,-0.6 -1.969,-0.606 -1.975,-0.611 -1.981,-0.617 -1.987,-0.621 -1.993,-0.626 -2,-0.63 -2.007,-0.634 -2.014,-0.637 -2.021,-0.64 -2.029,-0.643 -2.036,-0.645 -2.044,-0.647 -2.052,-0.648 -2.059,-0.649 -2.067,-0.65 -2.875,-0.65 -2.875,-0.35 -2.067,-0.35
  Top Layer region: -0.984,-1.926 -0.977,-1.927 -0.969,-1.928 -0.961,-1.93 -0.954,-1.932 -0.946,-1.935 -0.939,-1.938 -0.932,-1.941 -0.925,-1.945 -0.918,-1.949 -0.912,-1.954 -0.906,-1.958 -0.9,-1.964 -0.894,-1.969 -0.889,-1.975 -0.883,-1.981 -0.879,-1.987 -0.874,-1.993 -0.87,-2 -0.866,-2.007 -0.863,-2.014 -0.86,-2.021 -0.857,-2.029 -0.855,-2.036 -0.853,-2.044 -0.852,-2.052 -0.851,-2.059 -0.85,-2.067 -0.85,-2.075 -0.85,-2.875 -1.15,-2.875 -1.15,-2.075 -1.15,-2.067 -1.149,-2.059 -1.148,-2.052 -1.147,-2.044 -1.145,-2.036 -1.143,-2.029 -1.14,-2.021 -1.137,-2.014 -1.134,-2.007 -1.13,-2 -1.126,-1.993 -1.121,-1.987 -1.117,-1.981 -1.111,-1.975 -1.106,-1.969 -1.1,-1.964 -1.094,-1.958 -1.088,-1.954 -1.082,-1.949 -1.075,-1.945 -1.068,-1.941 -1.061,-1.938 -1.054,-1.935 -1.046,-1.932 -1.039,-1.93 -1.031,-1.928 -1.023,-1.927 -1.016,-1.926 -1.008,-1.925 -0.992,-1.925
  Top Layer region: -0.484,-1.926 -0.477,-1.927 -0.469,-1.928 -0.461,-1.93 -0.454,-1.932 -0.446,-1.935 -0.439,-1.938 -0.432,-1.941 -0.425,-1.945 -0.418,-1.949 -0.412,-1.954 -0.406,-1.958 -0.4,-1.964 -0.394,-1.969 -0.389,-1.975 -0.383,-1.981 -0.379,-1.987 -0.374,-1.993 -0.37,-2 -0.366,-2.007 -0.363,-2.014 -0.36,-2.021 -0.357,-2.029 -0.355,-2.036 -0.353,-2.044 -0.352,-2.052 -0.351,-2.059 -0.35,-2.067 -0.35,-2.075 -0.35,-2.875 -0.65,-2.875 -0.65,-2.075 -0.65,-2.067 -0.649,-2.059 -0.648,-2.052 -0.647,-2.044 -0.645,-2.036 -0.643,-2.029 -0.64,-2.021 -0.637,-2.014 -0.634,-2.007 -0.63,-2 -0.626,-1.993 -0.621,-1.987 -0.617,-1.981 -0.611,-1.975 -0.606,-1.969 -0.6,-1.964 -0.594,-1.958 -0.588,-1.954 -0.582,-1.949 -0.575,-1.945 -0.568,-1.941 -0.561,-1.938 -0.554,-1.935 -0.546,-1.932 -0.539,-1.93 -0.531,-1.928 -0.523,-1.927 -0.516,-1.926 -0.508,-1.925 -0.492,-1.925
  Top Layer region: 0.016,-1.926 0.023,-1.927 0.031,-1.928 0.039,-1.93 0.046,-1.932 0.054,-1.935 0.061,-1.938 0.068,-1.941 0.075,-1.945 0.082,-1.949 0.088,-1.954 0.094,-1.958 0.1,-1.964 0.106,-1.969 0.111,-1.975 0.117,-1.981 0.121,-1.987 0.126,-1.993 0.13,-2 0.134,-2.007 0.137,-2.014 0.14,-2.021 0.143,-2.029 0.145,-2.036 0.147,-2.044 0.148,-2.052 0.149,-2.059 0.15,-2.067 0.15,-2.075 0.15,-2.875 -0.15,-2.875 -0.15,-2.075 -0.15,-2.067 -0.149,-2.059 -0.148,-2.052 -0.147,-2.044 -0.145,-2.036 -0.143,-2.029 -0.14,-2.021 -0.137,-2.014 -0.134,-2.007 -0.13,-2 -0.126,-1.993 -0.121,-1.987 -0.117,-1.981 -0.111,-1.975 -0.106,-1.969 -0.1,-1.964 -0.094,-1.958 -0.088,-1.954 -0.082,-1.949 -0.075,-1.945 -0.068,-1.941 -0.061,-1.938 -0.054,-1.935 -0.046,-1.932 -0.039,-1.93 -0.031,-1.928 -0.023,-1.927 -0.016,-1.926 -0.008,-1.925 0.008,-1.925
  Top Layer region: 0.516,-1.926 0.523,-1.927 0.531,-1.928 0.539,-1.93 0.546,-1.932 0.554,-1.935 0.561,-1.938 0.568,-1.941 0.575,-1.945 0.582,-1.949 0.588,-1.954 0.594,-1.958 0.6,-1.964 0.606,-1.969 0.611,-1.975 0.617,-1.981 0.621,-1.987 0.626,-1.993 0.63,-2 0.634,-2.007 0.637,-2.014 0.64,-2.021 0.643,-2.029 0.645,-2.036 0.647,-2.044 0.648,-2.052 0.649,-2.059 0.65,-2.067 0.65,-2.075 0.65,-2.875 0.35,-2.875 0.35,-2.075 0.35,-2.067 0.351,-2.059 0.352,-2.052 0.353,-2.044 0.355,-2.036 0.357,-2.029 0.36,-2.021 0.363,-2.014 0.366,-2.007 0.37,-2 0.374,-1.993 0.379,-1.987 0.383,-1.981 0.389,-1.975 0.394,-1.969 0.4,-1.964 0.406,-1.958 0.412,-1.954 0.418,-1.949 0.425,-1.945 0.432,-1.941 0.439,-1.938 0.446,-1.935 0.454,-1.932 0.461,-1.93 0.469,-1.928 0.477,-1.927 0.484,-1.926 0.492,-1.925 0.508,-1.925
  Top Layer region: 1.016,-1.926 1.023,-1.927 1.031,-1.928 1.039,-1.93 1.046,-1.932 1.054,-1.935 1.061,-1.938 1.068,-1.941 1.075,-1.945 1.082,-1.949 1.088,-1.954 1.094,-1.958 1.1,-1.964 1.106,-1.969 1.111,-1.975 1.117,-1.981 1.121,-1.987 1.126,-1.993 1.13,-2 1.134,-2.007 1.137,-2.014 1.14,-2.021 1.143,-2.029 1.145,-2.036 1.147,-2.044 1.148,-2.052 1.149,-2.059 1.15,-2.067 1.15,-2.075 1.15,-2.875 0.85,-2.875 0.85,-2.075 0.85,-2.067 0.851,-2.059 0.852,-2.052 0.853,-2.044 0.855,-2.036 0.857,-2.029 0.86,-2.021 0.863,-2.014 0.866,-2.007 0.87,-2 0.874,-1.993 0.879,-1.987 0.883,-1.981 0.889,-1.975 0.894,-1.969 0.9,-1.964 0.906,-1.958 0.912,-1.954 0.918,-1.949 0.925,-1.945 0.932,-1.941 0.939,-1.938 0.946,-1.935 0.954,-1.932 0.961,-1.93 0.969,-1.928 0.977,-1.927 0.984,-1.926 0.992,-1.925 1.008,-1.925
  Top Layer region: 1.516,-1.926 1.523,-1.927 1.531,-1.928 1.539,-1.93 1.546,-1.932 1.554,-1.935 1.561,-1.938 1.568,-1.941 1.575,-1.945 1.582,-1.949 1.588,-1.954 1.594,-1.958 1.6,-1.964 1.606,-1.969 1.611,-1.975 1.617,-1.981 1.621,-1.987 1.626,-1.993 1.63,-2 1.634,-2.007 1.637,-2.014 1.64,-2.021 1.643,-2.029 1.645,-2.036 1.647,-2.044 1.648,-2.052 1.649,-2.059 1.65,-2.067 1.65,-2.075 1.65,-2.875 1.35,-2.875 1.35,-2.075 1.35,-2.067 1.351,-2.059 1.352,-2.052 1.353,-2.044 1.355,-2.036 1.357,-2.029 1.36,-2.021 1.363,-2.014 1.366,-2.007 1.37,-2 1.374,-1.993 1.379,-1.987 1.383,-1.981 1.389,-1.975 1.394,-1.969 1.4,-1.964 1.406,-1.958 1.412,-1.954 1.418,-1.949 1.425,-1.945 1.432,-1.941 1.439,-1.938 1.446,-1.935 1.454,-1.932 1.461,-1.93 1.469,-1.928 1.477,-1.927 1.484,-1.926 1.492,-1.925 1.508,-1.925
  Top Layer region: 1.65,2.075 1.65,2.067 1.649,2.059 1.648,2.052 1.647,2.044 1.645,2.036 1.643,2.029 1.64,2.021 1.637,2.014 1.634,2.007 1.63,2 1.626,1.993 1.621,1.987 1.617,1.981 1.611,1.975 1.606,1.969 1.6,1.964 1.594,1.958 1.588,1.954 1.582,1.949 1.575,1.945 1.568,1.941 1.561,1.938 1.554,1.935 1.546,1.932 1.539,1.93 1.531,1.928 1.523,1.927 1.516,1.926 1.508,1.925 1.492,1.925 1.484,1.926 1.477,1.927 1.469,1.928 1.461,1.93 1.454,1.932 1.446,1.935 1.439,1.938 1.432,1.941 1.425,1.945 1.418,1.949 1.412,1.954 1.406,1.958 1.4,1.964 1.394,1.969 1.389,1.975 1.383,1.981 1.379,1.987 1.374,1.993 1.37,2 1.366,2.007 1.363,2.014 1.36,2.021 1.357,2.029 1.355,2.036 1.353,2.044 1.352,2.052 1.351,2.059 1.35,2.067 1.35,2.075 1.35,2.875 1.65,2.875
  Top Layer region: 2.875,-1.65 2.067,-1.65 2.059,-1.649 2.052,-1.648 2.044,-1.647 2.036,-1.645 2.029,-1.643 2.021,-1.64 2.014,-1.637 2.007,-1.634 2,-1.63 1.993,-1.626 1.987,-1.621 1.981,-1.617 1.975,-1.611 1.969,-1.606 1.964,-1.6 1.958,-1.594 1.954,-1.588 1.949,-1.582 1.945,-1.575 1.941,-1.568 1.938,-1.561 1.935,-1.554 1.932,-1.546 1.93,-1.539 1.928,-1.531 1.927,-1.523 1.926,-1.516 1.925,-1.508 1.925,-1.5 1.925,-1.492 1.926,-1.484 1.927,-1.477 1.928,-1.469 1.93,-1.461 1.932,-1.454 1.935,-1.446 1.938,-1.439 1.941,-1.432 1.945,-1.425 1.949,-1.418 1.954,-1.412 1.958,-1.406 1.964,-1.4 1.969,-1.394 1.975,-1.389 1.981,-1.383 1.987,-1.379 1.993,-1.374 2,-1.37 2.007,-1.366 2.014,-1.363 2.021,-1.36 2.029,-1.357 2.036,-1.355 2.044,-1.353 2.052,-1.352 2.059,-1.351 2.067,-1.35 2.875,-1.35
  Top Layer region: 2.875,-1.15 2.067,-1.15 2.059,-1.149 2.052,-1.148 2.044,-1.147 2.036,-1.145 2.029,-1.143 2.021,-1.14 2.014,-1.137 2.007,-1.134 2,-1.13 1.993,-1.126 1.987,-1.121 1.981,-1.117 1.975,-1.111 1.969,-1.106 1.964,-1.1 1.958,-1.094 1.954,-1.088 1.949,-1.082 1.945,-1.075 1.941,-1.068 1.938,-1.061 1.935,-1.054 1.932,-1.046 1.93,-1.039 1.928,-1.031 1.927,-1.023 1.926,-1.016 1.925,-1.008 1.925,-1 1.925,-0.992 1.926,-0.984 1.927,-0.977 1.928,-0.969 1.93,-0.961 1.932,-0.954 1.935,-0.946 1.938,-0.939 1.941,-0.932 1.945,-0.925 1.949,-0.918 1.954,-0.912 1.958,-0.906 1.964,-0.9 1.969,-0.894 1.975,-0.889 1.981,-0.883 1.987,-0.879 1.993,-0.874 2,-0.87 2.007,-0.866 2.014,-0.863 2.021,-0.86 2.029,-0.857 2.036,-0.855 2.044,-0.853 2.052,-0.852 2.059,-0.851 2.067,-0.85 2.875,-0.85
  Top Layer region: 2.875,-0.65 2.067,-0.65 2.059,-0.649 2.052,-0.648 2.044,-0.647 2.036,-0.645 2.029,-0.643 2.021,-0.64 2.014,-0.637 2.007,-0.634 2,-0.63 1.993,-0.626 1.987,-0.621 1.981,-0.617 1.975,-0.611 1.969,-0.606 1.964,-0.6 1.958,-0.594 1.954,-0.588 1.949,-0.582 1.945,-0.575 1.941,-0.568 1.938,-0.561 1.935,-0.554 1.932,-0.546 1.93,-0.539 1.928,-0.531 1.927,-0.523 1.926,-0.516 1.925,-0.508 1.925,-0.5 1.925,-0.492 1.926,-0.484 1.927,-0.477 1.928,-0.469 1.93,-0.461 1.932,-0.454 1.935,-0.446 1.938,-0.439 1.941,-0.432 1.945,-0.425 1.949,-0.418 1.954,-0.412 1.958,-0.406 1.964,-0.4 1.969,-0.394 1.975,-0.389 1.981,-0.383 1.987,-0.379 1.993,-0.374 2,-0.37 2.007,-0.366 2.014,-0.363 2.021,-0.36 2.029,-0.357 2.036,-0.355 2.044,-0.353 2.052,-0.352 2.059,-0.351 2.067,-0.35 2.875,-0.35
  Top Layer region: 2.875,-0.15 2.067,-0.15 2.059,-0.149 2.052,-0.148 2.044,-0.147 2.036,-0.145 2.029,-0.143 2.021,-0.14 2.014,-0.137 2.007,-0.134 2,-0.13 1.993,-0.126 1.987,-0.121 1.981,-0.117 1.975,-0.111 1.969,-0.106 1.964,-0.1 1.958,-0.094 1.954,-0.088 1.949,-0.082 1.945,-0.075 1.941,-0.068 1.938,-0.061 1.935,-0.054 1.932,-0.046 1.93,-0.039 1.928,-0.031 1.927,-0.023 1.926,-0.016 1.925,-0.008 1.925,0 1.925,0.008 1.926,0.016 1.927,0.023 1.928,0.031 1.93,0.039 1.932,0.046 1.935,0.054 1.938,0.061 1.941,0.068 1.945,0.075 1.949,0.082 1.954,0.088 1.958,0.094 1.964,0.1 1.969,0.106 1.975,0.111 1.981,0.117 1.987,0.121 1.993,0.126 2,0.13 2.007,0.134 2.014,0.137 2.021,0.14 2.029,0.143 2.036,0.145 2.044,0.147 2.052,0.148 2.059,0.149 2.067,0.15 2.875,0.15
  Top Layer region: 2.875,0.35 2.067,0.35 2.059,0.351 2.052,0.352 2.044,0.353 2.036,0.355 2.029,0.357 2.021,0.36 2.014,0.363 2.007,0.366 2,0.37 1.993,0.374 1.987,0.379 1.981,0.383 1.975,0.389 1.969,0.394 1.964,0.4 1.958,0.406 1.954,0.412 1.949,0.418 1.945,0.425 1.941,0.432 1.938,0.439 1.935,0.446 1.932,0.454 1.93,0.461 1.928,0.469 1.927,0.477 1.926,0.484 1.925,0.492 1.925,0.5 1.925,0.508 1.926,0.516 1.927,0.523 1.928,0.531 1.93,0.539 1.932,0.546 1.935,0.554 1.938,0.561 1.941,0.568 1.945,0.575 1.949,0.582 1.954,0.588 1.958,0.594 1.964,0.6 1.969,0.606 1.975,0.611 1.981,0.617 1.987,0.621 1.993,0.626 2,0.63 2.007,0.634 2.014,0.637 2.021,0.64 2.029,0.643 2.036,0.645 2.044,0.647 2.052,0.648 2.059,0.649 2.067,0.65 2.875,0.65
  Top Layer region: 2.875,0.85 2.067,0.85 2.059,0.851 2.052,0.852 2.044,0.853 2.036,0.855 2.029,0.857 2.021,0.86 2.014,0.863 2.007,0.866 2,0.87 1.993,0.874 1.987,0.879 1.981,0.883 1.975,0.889 1.969,0.894 1.964,0.9 1.958,0.906 1.954,0.912 1.949,0.918 1.945,0.925 1.941,0.932 1.938,0.939 1.935,0.946 1.932,0.954 1.93,0.961 1.928,0.969 1.927,0.977 1.926,0.984 1.925,0.992 1.925,1 1.925,1.008 1.926,1.016 1.927,1.023 1.928,1.031 1.93,1.039 1.932,1.046 1.935,1.054 1.938,1.061 1.941,1.068 1.945,1.075 1.949,1.082 1.954,1.088 1.958,1.094 1.964,1.1 1.969,1.106 1.975,1.111 1.981,1.117 1.987,1.121 1.993,1.126 2,1.13 2.007,1.134 2.014,1.137 2.021,1.14 2.029,1.143 2.036,1.145 2.044,1.147 2.052,1.148 2.059,1.149 2.067,1.15 2.875,1.15
  Top Layer region: 2.875,1.35 2.067,1.35 2.059,1.351 2.052,1.352 2.044,1.353 2.036,1.355 2.029,1.357 2.021,1.36 2.014,1.363 2.007,1.366 2,1.37 1.993,1.374 1.987,1.379 1.981,1.383 1.975,1.389 1.969,1.394 1.964,1.4 1.958,1.406 1.954,1.412 1.949,1.418 1.945,1.425 1.941,1.432 1.938,1.439 1.935,1.446 1.932,1.454 1.93,1.461 1.928,1.469 1.927,1.477 1.926,1.484 1.925,1.492 1.925,1.5 1.925,1.508 1.926,1.516 1.927,1.523 1.928,1.531 1.93,1.539 1.932,1.546 1.935,1.554 1.938,1.561 1.941,1.568 1.945,1.575 1.949,1.582 1.954,1.588 1.958,1.594 1.964,1.6 1.969,1.606 1.975,1.611 1.981,1.617 1.987,1.621 1.993,1.626 2,1.63 2.007,1.634 2.014,1.637 2.021,1.64 2.029,1.643 2.036,1.645 2.044,1.647 2.052,1.648 2.059,1.649 2.067,1.65 2.875,1.65
  Top Layer region: 1.15,2.075 1.15,2.067 1.149,2.059 1.148,2.052 1.147,2.044 1.145,2.036 1.143,2.029 1.14,2.021 1.137,2.014 1.134,2.007 1.13,2 1.126,1.993 1.121,1.987 1.117,1.981 1.111,1.975 1.106,1.969 1.1,1.964 1.094,1.958 1.088,1.954 1.082,1.949 1.075,1.945 1.068,1.941 1.061,1.938 1.054,1.935 1.046,1.932 1.039,1.93 1.031,1.928 1.023,1.927 1.016,1.926 1.008,1.925 0.992,1.925 0.984,1.926 0.977,1.927 0.969,1.928 0.961,1.93 0.954,1.932 0.946,1.935 0.939,1.938 0.932,1.941 0.925,1.945 0.918,1.949 0.912,1.954 0.906,1.958 0.9,1.964 0.894,1.969 0.889,1.975 0.883,1.981 0.879,1.987 0.874,1.993 0.87,2 0.866,2.007 0.863,2.014 0.86,2.021 0.857,2.029 0.855,2.036 0.853,2.044 0.852,2.052 0.851,2.059 0.85,2.067 0.85,2.075 0.85,2.875 1.15,2.875
  Top Layer region: 0.15,2.075 0.15,2.067 0.149,2.059 0.148,2.052 0.147,2.044 0.145,2.036 0.143,2.029 0.14,2.021 0.137,2.014 0.134,2.007 0.13,2 0.126,1.993 0.121,1.987 0.117,1.981 0.111,1.975 0.106,1.969 0.1,1.964 0.094,1.958 0.088,1.954 0.082,1.949 0.075,1.945 0.068,1.941 0.061,1.938 0.054,1.935 0.046,1.932 0.039,1.93 0.031,1.928 0.023,1.927 0.016,1.926 0.008,1.925 -0.008,1.925 -0.016,1.926 -0.023,1.927 -0.031,1.928 -0.039,1.93 -0.046,1.932 -0.054,1.935 -0.061,1.938 -0.068,1.941 -0.075,1.945 -0.082,1.949 -0.088,1.954 -0.094,1.958 -0.1,1.964 -0.106,1.969 -0.111,1.975 -0.117,1.981 -0.121,1.987 -0.126,1.993 -0.13,2 -0.134,2.007 -0.137,2.014 -0.14,2.021 -0.143,2.029 -0.145,2.036 -0.147,2.044 -0.148,2.052 -0.149,2.059 -0.15,2.067 -0.15,2.075 -0.15,2.875 0.15,2.875
  Top Layer region: -0.35,2.075 -0.35,2.067 -0.351,2.059 -0.352,2.052 -0.353,2.044 -0.355,2.036 -0.357,2.029 -0.36,2.021 -0.363,2.014 -0.366,2.007 -0.37,2 -0.374,1.993 -0.379,1.987 -0.383,1.981 -0.389,1.975 -0.394,1.969 -0.4,1.964 -0.406,1.958 -0.412,1.954 -0.418,1.949 -0.425,1.945 -0.432,1.941 -0.439,1.938 -0.446,1.935 -0.454,1.932 -0.461,1.93 -0.469,1.928 -0.477,1.927 -0.484,1.926 -0.492,1.925 -0.508,1.925 -0.516,1.926 -0.523,1.927 -0.531,1.928 -0.539,1.93 -0.546,1.932 -0.554,1.935 -0.561,1.938 -0.568,1.941 -0.575,1.945 -0.582,1.949 -0.588,1.954 -0.594,1.958 -0.6,1.964 -0.606,1.969 -0.611,1.975 -0.617,1.981 -0.621,1.987 -0.626,1.993 -0.63,2 -0.634,2.007 -0.637,2.014 -0.64,2.021 -0.643,2.029 -0.645,2.036 -0.647,2.044 -0.648,2.052 -0.649,2.059 -0.65,2.067 -0.65,2.075 -0.65,2.875 -0.35,2.875
  Top Layer region: -0.85,2.075 -0.85,2.067 -0.851,2.059 -0.852,2.052 -0.853,2.044 -0.855,2.036 -0.857,2.029 -0.86,2.021 -0.863,2.014 -0.866,2.007 -0.87,2 -0.874,1.993 -0.879,1.987 -0.883,1.981 -0.889,1.975 -0.894,1.969 -0.9,1.964 -0.906,1.958 -0.912,1.954 -0.918,1.949 -0.925,1.945 -0.932,1.941 -0.939,1.938 -0.946,1.935 -0.954,1.932 -0.961,1.93 -0.969,1.928 -0.977,1.927 -0.984,1.926 -0.992,1.925 -1.008,1.925 -1.016,1.926 -1.023,1.927 -1.031,1.928 -1.039,1.93 -1.046,1.932 -1.054,1.935 -1.061,1.938 -1.068,1.941 -1.075,1.945 -1.082,1.949 -1.088,1.954 -1.094,1.958 -1.1,1.964 -1.106,1.969 -1.111,1.975 -1.117,1.981 -1.121,1.987 -1.126,1.993 -1.13,2 -1.134,2.007 -1.137,2.014 -1.14,2.021 -1.143,2.029 -1.145,2.036 -1.147,2.044 -1.148,2.052 -1.149,2.059 -1.15,2.067 -1.15,2.075 -1.15,2.875 -0.85,2.875
  silkscreen extent -3.6,-2.5 2.5,2.5, body extent -2.5,-2.5 2.5,2.5, height 0.8
DBV0005A_L_Single_Bus_Buffer_Gate [mm] "SOT23, 5-Leads, Body 3.05x1.75mm, Pitch 0.95mm, IPC High Density."
  rrect18% 0.8x0.55 smd: 1(-1.275,0.95) 2(-1.275,0) 3(-1.275,-0.95) 4(1.275,-0.95) 5(1.275,0.95)
  silkscreen extent -1.4,-1.55 0.5,1.9, body extent -1.42,-1.46 1.42,1.46, height 1.08
DCDC_Converter [mm] "LTM4627EY#PBF, BGA133C127P12X12_1500X1500X512N, Module DC-DC 1-OUT 0.6V to 5V 15A Automotive 133-Pin BGA Tray."
  round 0.61 smd: A1(-6.985,6.985) A2(-5.715,6.985) A3(-4.445,6.985) A4(-3.175,6.985) A5(-1.905,6.985) A6(-0.635,6.985) A7(0.635,6.985) A8(1.905,6.985) A9(3.175,6.985) A10(4.445,6.985) A11(5.715,6.985) A12(6.985,6.985) B1(-6.985,5.715) B2(-5.715,5.715) B3(-4.445,5.715) B4(-3.175,5.715) B5(-1.905,5.715) B6(-0.635,5.715) B7(0.635,5.715) B9(3.175,5.715) B11(5.715,5.715) B12(6.985,5.715) C1(-6.985,4.445) C2(-5.715,4.445) C3(-4.445,4.445) C4(-3.175,4.445) C5(-1.905,4.445) C6(-0.635,4.445) C7(0.635,4.445) C9(3.175,4.445) C10(4.445,4.445) C11(5.715,4.445) C12(6.985,4.445) D1(-6.985,3.175) D2(-5.715,3.175) D3(-4.445,3.175) D4(-3.175,3.175) D5(-1.905,3.175) D6(-0.635,3.175) D8(1.905,3.175) D9(3.175,3.175) D10(4.445,3.175) D11(5.715,3.175) D12(6.985,3.175) E1(-6.985,1.905) E2(-5.715,1.905) E3(-4.445,1.905) E4(-3.175,1.905) E5(-1.905,1.905) E6(-0.635,1.905) E7(0.635,1.905) E9(3.175,1.905) E12(6.985,1.905) F1(-6.985,0.635) F2(-5.715,0.635) F3(-4.445,0.635) F4(-3.175,0.635) F5(-1.905,0.635) F6(-0.635,0.635) F7(0.635,0.635) F8(1.905,0.635) F9(3.175,0.635) F11(5.715,0.635) F12(6.985,0.635) G1(-6.985,-0.635) G2(-5.715,-0.635) G3(-4.445,-0.635) G4(-3.175,-0.635) G5(-1.905,-0.635) G6(-0.635,-0.635) G7(0.635,-0.635) G8(1.905,-0.635) G9(3.175,-0.635) G11(5.715,-0.635) G12(6.985,-0.635) H1(-6.985,-1.905) H2(-5.715,-1.905) H3(-4.445,-1.905) H4(-3.175,-1.905) H5(-1.905,-1.905) H6(-0.635,-1.905) H7(0.635,-1.905) H8(1.905,-1.905) H9(3.175,-1.905) H11(5.715,-1.905) H12(6.985,-1.905) J1(-6.985,-3.175) J2(-5.715,-3.175) J3(-4.445,-3.175) J4(-3.175,-3.175) J5(-1.905,-3.175) J6(-0.635,-3.175) J7(0.635,-3.175) J8(1.905,-3.175) J9(3.175,-3.175) J10(4.445,-3.175) J12(6.985,-3.175) K1(-6.985,-4.445) K2(-5.715,-4.445) K3(-4.445,-4.445) K4(-3.175,-4.445) K5(-1.905,-4.445) K6(-0.635,-4.445) K7(0.635,-4.445) K8(1.905,-4.445) K9(3.175,-4.445) K10(4.445,-4.445) K11(5.715,-4.445) K12(6.985,-4.445) L1(-6.985,-5.715) L2(-5.715,-5.715) L3(-4.445,-5.715) L4(-3.175,-5.715) L5(-1.905,-5.715) L6(-0.635,-5.715) L7(0.635,-5.715) L8(1.905,-5.715) L9(3.175,-5.715) L10(4.445,-5.715) L11(5.715,-5.715) L12(6.985,-5.715) M1(-6.985,-6.985) M2(-5.715,-6.985) M3(-4.445,-6.985) M4(-3.175,-6.985) M5(-1.905,-6.985) M6(-0.635,-6.985) M7(0.635,-6.985) M8(1.905,-6.985) M9(3.175,-6.985) M10(4.445,-6.985) M11(5.715,-6.985) M12(6.985,-6.985)
  silkscreen extent -8.27,-7.5 7.5,7.5, body extent -7.5,-7.5 7.5,7.5, height 5.12
ESD_Protecction_Diode [mm] "ESD5B5.0ST1G"
  rect 0.7x0.5 smd: A(0.7,0) K(-0.6,0)
  body extent -0.8,-0.4 0.8,0.4, height 0.7
ESP32-S3-WROOM-2 [mm] "ESP32-S3-WROOM-2-N32R16V"
  rect 1.5x0.9 smd: 1(-8.75,8.88) 2(-8.75,7.61) 3(-8.75,6.34) 4(-8.75,5.07) 5(-8.75,3.8) 6(-8.75,2.53) 7(-8.75,1.26) 8(-8.75,-0.01) 9(-8.75,-1.28) 10(-8.75,-2.55) 11(-8.75,-3.82) 12(-8.75,-5.09) 13(-8.75,-6.36) 14(-8.75,-7.63) 27(8.75,-7.63) 28(8.75,-6.36) 29(8.75,-5.09) 30(8.75,-3.82) 31(8.75,-2.55) 32(8.75,-1.28) 33(8.75,-0.01) 34(8.75,1.26) 35(8.75,2.53) 36(8.75,3.8) 37(8.75,5.07) 38(8.75,6.34) 39(8.75,7.61) 40(8.75,8.88)
  rect 0.9x1.5 smd: 15(-6.985,-8.88) 16(-5.715,-8.88) 17(-4.445,-8.88) 18(-3.175,-8.88) 19(-1.905,-8.88) 20(-0.635,-8.88) 21(0.635,-8.88) 22(1.905,-8.88) 23(3.175,-8.88) 24(4.445,-8.88) 25(5.715,-8.88) 26(6.985,-8.88)
  rect 4x4 smd paste-2539.97: 41(-1.383,3.55)
  Top Layer region: -4.477,6.639 1.68,6.639 1.68,0.46 -4.477,0.46
  Top Layer keep-out region: -9.023,10.39 8.977,10.39 8.977,16.39 -9.023,16.39
  Bottom Layer keep-out region: -9.023,10.39 8.977,10.39 8.977,16.39 -9.023,16.39
  silkscreen extent -9.02,-9.11 8.98,16.39, body extent -9,-9.13 9,16.37, height 3.25
Fuse [mil] "0154010.DR, FUSE BRD MNT 10A 125VAC/VDC SMD"
  rect 167x150 smd: 1(-125.5,0) 2(125.5,0)
  silkscreen extent -184,-99 184,99, body extent -192,-99 192,99, height 150
LD1117S33CTR [mil] "LDO, 3.3V and 800mA."
  rect 59x79 smd: 1(-89,-124) 2(1,-124) 3(91,-124)
  rect 150x79 smd: 4(0,124)
  silkscreen extent -129,-70 129,70, body extent -128,-138 128,138, height 71
"LED_0603, GREEN" [mm] "LED 0603, Green, 3.2 V, 20 mA, 430 mcd"
  rrect50% 0.65x0.85 smd: A(-0.65,0)
  rect 0.65x0.85 smd: K(0.65,0)
  silkscreen extent -1.05,-0.45 1.05,0.45, body extent -0.85,-0.45 0.85,0.45, height 1.1
"Mounting Hole M3, plated" [mm] "Mounting Hole for M3 Screw, plated to connect signal"
  round 7 / inner round 5 / far side round 7 hole 3.2: 1(0,0)
  silkscreen extent -2.9,-2.9 2.9,2.9, body extent -2.25,1.2 -1.26,2.2, height 0
NPN_Bipolar_Transistor [mm] "SS8050 SOT - 23."
  rect 0.8x0.6 smd: 1(-1.01,0.95) 2(-1.01,-0.95) 3(1.01,0)
  silkscreen extent -1.11,-1.45 0.65,2.35, body extent -1.2,-1.45 1.2,1.45, height 1.14
Optocoupler [mm] "TLP291(GB-TP,SE), Optoisolator Transistor Output 3750Vrms 1 Channel 4-SO."
  rrect25% 1.61x0.57 smd: 1(-3.25,0.635) 2(-3.25,-0.635) 3(3.25,-0.635) 4(3.25,0.635)
  silkscreen extent -4.7,-1.3 2.27,1.3, body extent -3.5,-1.3 3.5,1.3, height 2.3
PCB_Connector [mm] "XT60PW-M, Socket, DC supply, male, PIN: 2."
  rect 3.716x3.716 / inner round 3.716 / far side rect 3.716x3.716 hole 2.7 mask+0.102: 1(-3.6,6)
  round 3.716 hole 2.7 mask+0.102: 2(3.6,6)
  oval 1.2x2.4 hole 0.6 square mask+0.102: SH1(-6.75,0) SH2(6.75,0)
  silkscreen extent -9.8,-10.35 7.75,7.85, body extent -7.75,-10.35 7.75,7.85, height 8.4
PNP_Bipolar_Transistor [mm] "S8550, Bipolar (BJT) Transistor PNP 25 V 500 mA 150MHz 300 mW Surface Mount SOT-23."
  rect 0.9x0.8 smd: 1(-1,0.95) 2(-1,-0.95) 3(1,0)
  silkscreen extent -2.2,-1.45 0.7,1.45, body extent -1.26,-1.45 1.26,1.45, height 1.4
PTS636SK25SMTR [mm]
  rect 1x1.25 smd: 1(-3.875,0) 2(3.875,0)
  silkscreen extent -3.05,-1.85 3.05,1.85, body extent -4,-1.85 4,1.85, height 2.5
RJ45 [mm] "RJE091884511C, Jack Modular Connector 8p8c (RJ45, Ethernet) 90Â° Angle (Right) Shielded Cat3."
  rect 1.458x1.458 / inner round 1.458 / far side rect 1.458x1.458 hole 0.95: 1(-4.445,6.35)
  round 1.458 hole 0.95: 2(-3.175,8.89) 3(-1.905,6.35) 4(-0.635,8.89) 5(0.635,6.35) 6(1.905,8.89) 7(3.175,6.35) 8(4.445,8.89)
  round 2.475 hole 1.65: SH1(-7.75,-3.05) SH2(7.75,-3.05)
  round 3.25 hole 3.25 unplated: ""(-5.715,0) ""(5.715,0)
  silkscreen extent -9.84,-1.49 7.85,10.44, body extent -7.88,-7.74 7.88,10.46, height 13
Screw_Connector [mm] "691214110003 Wurth Elektronik, 3.50 mm Horizontal Entry Modular, 3p"
  rrect50% 1.95x1.95 hole 1.3: 1(-3.5,-0.3)
  round 1.95 hole 1.3: 2(0,-0.3) 3(3.5,-0.3)
  silkscreen extent -5.65,-3.7 5.25,3.7, body extent -5.7,-3.7 5.25,3.7, height 8.55
"Testpoint S2761-46R" [mm] "Prüfstecker und Messbuchsen EZ BoardWare S27 SMT Mini Test Terminal, Reel"
  rect 1.8x1 smd: 1(0,0)
  silkscreen extent -1.05,-0.65 1.05,0.65, body extent -0.8,-0.4 0.8,0.4, height 1.23
USB4105-GF-A [mm]
  rect 0.6x1.15 smd mask+0.05: A1_B12(-3.2,4.755) A4_B9(-2.4,4.755) B1_A12(3.2,4.755) B4_A9(2.4,4.755)
  rect 0.3x1.15 smd mask+0.05: A5(-1.25,4.755) A6(-0.25,4.755) A7(0.25,4.755) A8(1.25,4.755) B5(1.75,4.755) B6(0.75,4.755) B7(-0.75,4.755) B8(-1.75,4.755)
  oval 1x2.1 hole 0.6 slot 1.7 at 90 deg: SH1(-4.32,4.18) SH2(4.32,4.18)
  oval 1x1.8 hole 0.6 slot 1.4 at 90 deg: SH3(-4.32,0) SH4(4.32,0)
  round 0.65 hole 0.65 unplated: ""(-2.89,3.68) ""(2.89,3.68)
  silkscreen extent -4.47,-2.6 4.47,6.1, body extent -4.47,-2.6 4.47,5.11, height 3.31
USB_Digital_Isolator_A [mm] "ADUM3160BRWZ, DGT ISOL 2500VRMS 2CH USB 16SOIC."
  rect 2.598x0.622 smd paste+0 mask+0: 1(-4.578,4.445)
  rrect100% 2.598x0.622 smd paste+0 mask+0: 2(-4.578,3.175) 3(-4.578,1.905) 4(-4.578,0.635) 5(-4.578,-0.635) 6(-4.578,-1.905) 7(-4.578,-3.175) 8(-4.578,-4.445) 9(4.578,-4.445) 10(4.578,-3.175) 11(4.578,-1.905) 12(4.578,-0.635) 13(4.578,0.635) 14(4.578,1.905) 15(4.578,3.175) 16(4.578,4.445)
  silkscreen extent -6.58,-5.15 2.78,5.15, body extent -6.38,-5.65 6.38,5.65, height 0.25
WS2812B [mm]
  rect 1.5x0.9 smd: 1(-2.45,1.65) 2(-2.45,-1.65) 3(2.45,-1.65) 4(2.45,1.65)
  silkscreen extent -4.07,-2.5 2.5,2.5, body extent -2.7,-2.5 2.7,2.5, height 1.56